# Allegro board AXKU15_V1.0.brd
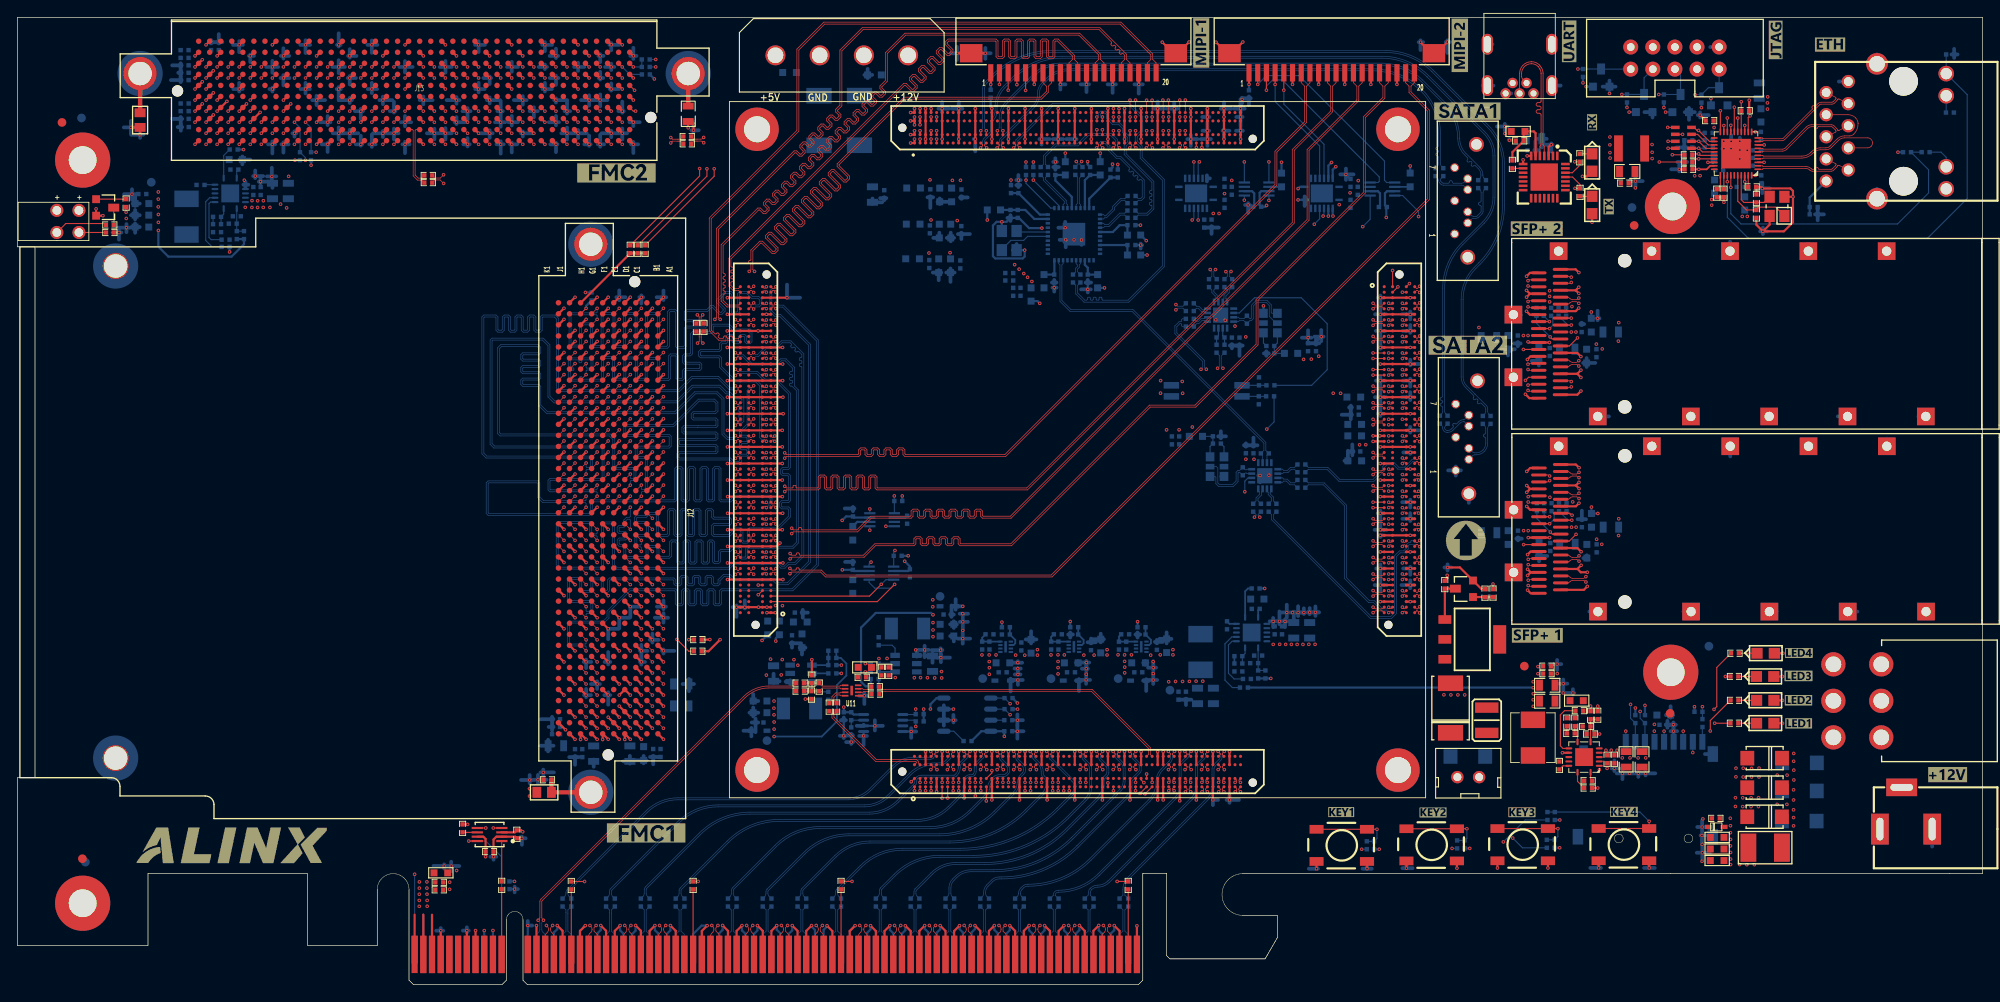
[diagram p0: board, top side]
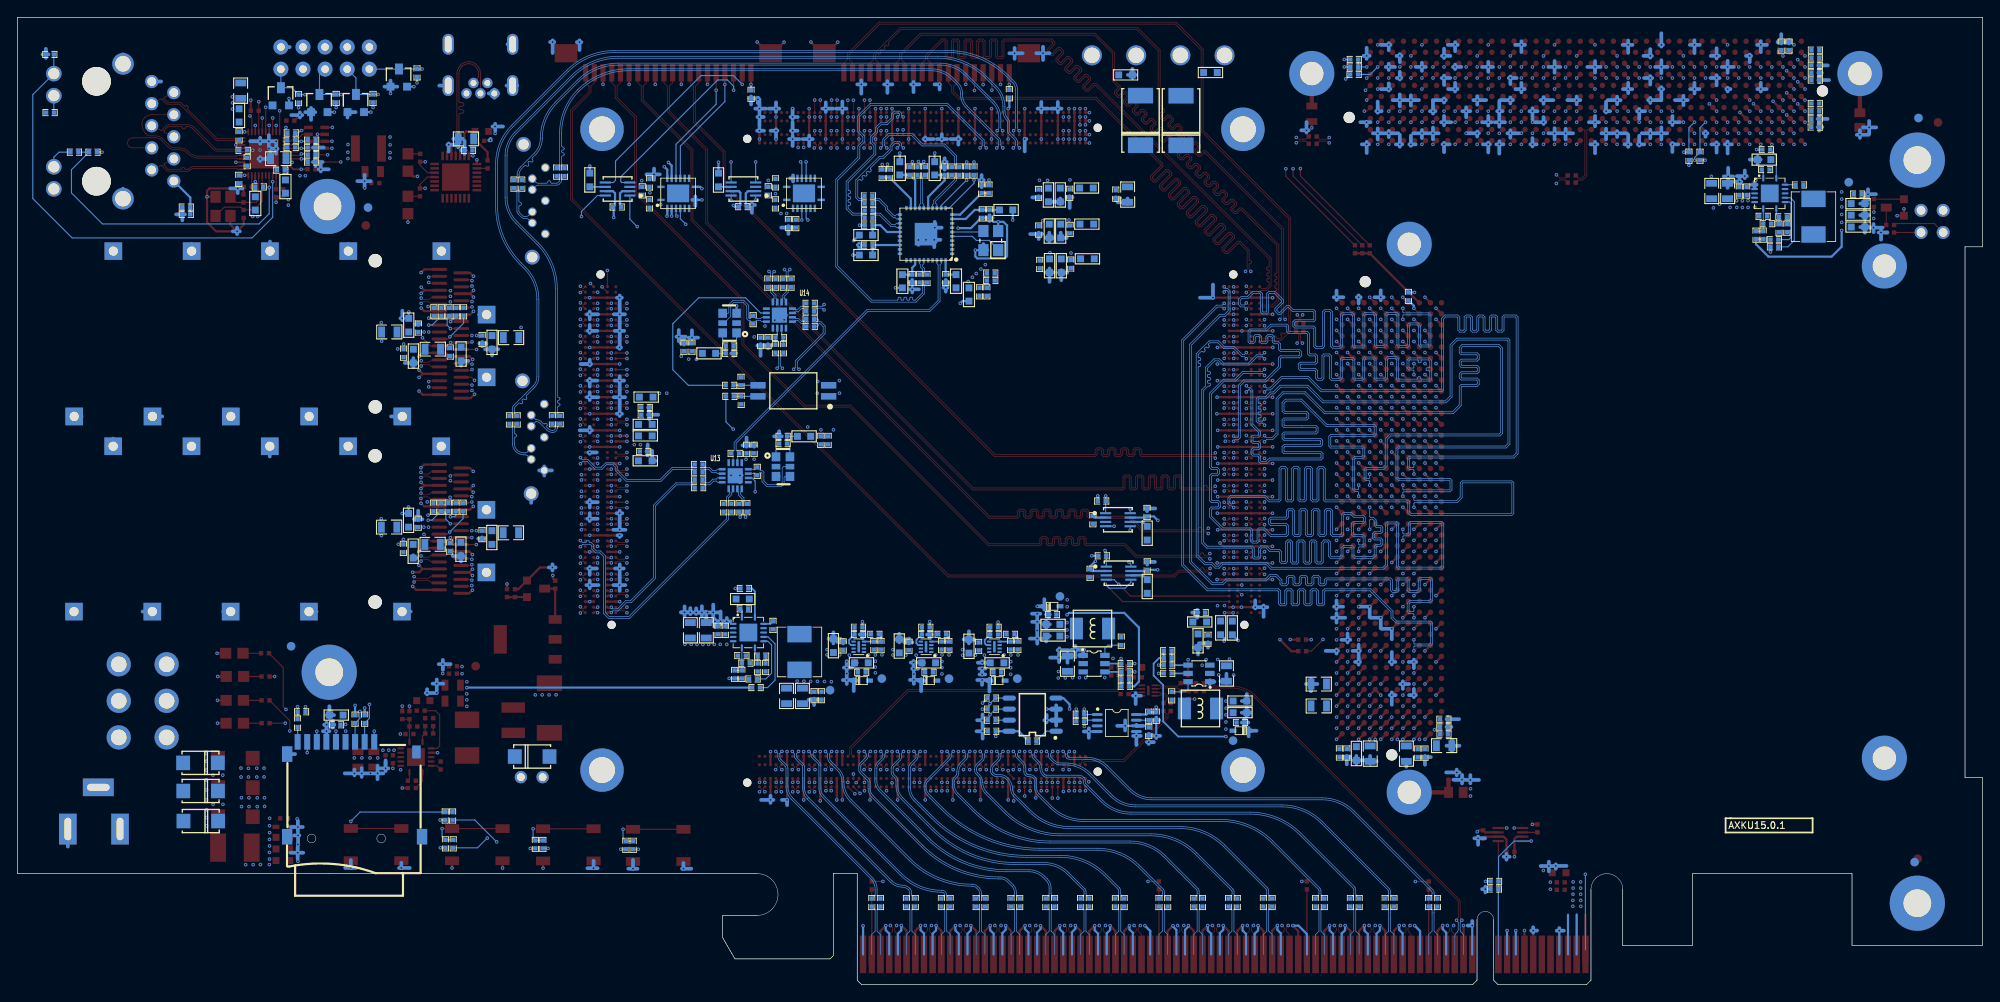
[diagram p1: board, bottom side, seen from below]

Outline 225.81 x 111.15 mm; copper layers: TOP, L2_GND, L3, L4_GND, L5, L6_VCC, L7_GND, L8, L9_GND, L10, L11_GND, L12, L13_GND, BOTTOM. Coordinates in mm from the lower left corner of the outline.
Outline path: 0,111.15 0,84.78 ; 0,111.15 189.99,111.15 ; 0,111.15 0,84.78 ; 0,111.15 189.99,111.15 ; 0,84.78 2.02,84.78 ; 0,84.78 2.02,84.78 ; 189.99,111.15 222,111.15 ; 189.99,111.15 222,111.15 ; 2.02,84.78 2.02,23.78 ; 2.02,84.78 2.02,23.78 ; 0,23.78 0,4.5 ; 0,23.78 2.02,23.78 ; 0,23.78 0,4.5 ; 0,23.78 2.02,23.78 ; 0,4.5 15,4.5 ; 0,4.5 15,4.5 ; 15,4.5 15,12.75 ; 15,4.5 15,12.75 ; 15,12.75 33.34,12.75 ; 15,12.75 33.34,12.75 ; 33.34,12.75 33.34,4.5 ; 33.34,12.75 33.34,4.5 ; 33.34,4.5 41.34,4.5 ; 33.34,4.5 41.34,4.5 ; 41.34,4.5 41.34,10.92 ; 41.34,4.5 41.34,10.92 ; 41.34,10.92 arc(43.17,12.75) 45,10.92 ; 45,10.92 45,0.51 ; 45,10.92 45,0.51 ; 45,0.51 45.51,0 ; 45,0.51 45.51,0 ; 45.51,0 55.68,0 ; 45.51,0 55.68,0 ; 55.68,0 56.19,0.51 ; 55.68,0 56.19,0.51 ; 56.19,0.51 56.19,7.45 ; 56.19,0.51 56.19,7.45 ; 56.19,7.45 arc(57.14,8.41) 58.09,7.45 ; 58.09,7.45 58.09,0.51 ; 58.09,7.45 58.09,0.51 ; 58.09,0.51 58.6,0 ; 58.09,0.51 58.6,0 ; 58.6,0 128.81,0 ; 58.6,0 128.81,0 ; 128.81,0 129.32,0.51 ; 128.81,0 129.32,0.51 ; 129.32,0.51 129.32,12.8 ; 129.32,0.51 129.32,12.8 ; 129.32,12.8 132.06,12.8 ; 129.32,12.8 132.06,12.8 ; 132.06,12.8 132.06,3.32 ; 132.06,12.8 132.06,3.32 ; 132.06,3.32 132.43,2.95 ; 132.06,3.32 132.43,2.95 ; 132.43,2.95 143.37,2.95 ; 132.43,2.95 143.37,2.95 ; 143.37,2.95 144.76,5.37 ; 143.37,2.95 144.76,5.37 ; 140.8,12.75 189.99,12.75 ; 140.8,12.75 arc(138.4,10.35) 140.8,7.96 ; 140.8,12.75 189.99,12.75 ; 189.99,12.75 222,12.75 ; 189.99,12.75 222,12.75 ; 140.8,7.96 144.76,7.96 ; 140.8,7.96 144.76,7.96 ; 144.76,7.96 144.76,5.37 ; 144.76,7.96 144.76,5.37 ; 222,111.15 225.81,111.15 ; 222,111.15 225.81,111.15 ; 222,12.75 225.81,12.75 ; 222,12.75 225.81,12.75 ; 225.81,111.15 225.81,12.75 ; 225.81,111.15 225.81,12.75

## Design rules (mm)
net group B91_L11: nets B91_L11_N B91_L11_P
net group B91_L12: nets B91_L12_N B91_L12_P
net group CLK0: nets CLK0_N CLK0_P
net group CLK1: nets CLK1_N CLK1_P
net group CLK2: nets CLK2_N CLK2_P
net group CLK3: nets CLK3_N CLK3_P
net group CLK4: nets CLK4_N CLK4_P
net group CLK5: nets CLK5_N CLK5_P
net group CLK7: nets CLK7_N CLK7_P
net group DP1: nets PCIE_TX4_N PCIE_TX4_P
net group DP2: nets PCIE_TX5_N PCIE_TX5_P
net group DP3: nets PCIE_TX6_N PCIE_TX6_P
net group DP4: nets PCIE_TX7_N PCIE_TX7_P
net group DP5: nets PCIE_TX8_N PCIE_TX8_P
net group DP6: nets PCIE_TX9_N PCIE_TX9_P
net group DP7: nets PCIE_TX10_N PCIE_TX10_P
net group DP8: nets PCIE_TX11_N PCIE_TX11_P
net group DP9: nets PCIE_TX12_N PCIE_TX12_P
net group DP10: nets PCIE_TX13_N PCIE_TX13_P
net group DP11: nets PCIE_TX14_N PCIE_TX14_P
net group DP12: nets PCIE_TX15_N PCIE_TX15_P
net group DP17: nets N23137851 N23137853
net group DP18: nets N23137905 N23137907
net group DP19: nets N23140613 N23140616
net group DP20: nets N23140649 N23140652
net group DP21: nets N23201610 N23201623
net group DP22: nets N18035589 N18035591
net group DP23: nets N18037072 N18037075
net group DP24: nets N18037090 N18037093
net group DP25: nets N18056326 N18056364
net group DP26: nets N18056302 N18056312
net group DP27: nets N18056270 N18056272
net group DP28: nets N18056216 N18056226
net group DP29: nets N18062568 N18062578
net group DP30: nets N18062486 N18062504
net group DP31: nets N18062600 N18062620
net group DP32: nets N18062640 N18062662
net group FMC1_GBTCLK0_M2C: nets FMC1_GBTCLK0_M2C_N FMC1_GBTCLK0_M2C_P
net group FMC1_GBTCLK1_M2C: nets FMC1_GBTCLK1_M2C_N FMC1_GBTCLK1_M2C_P
net group FMC1_HPC_GBTCLK0_M2C_C: nets FMC1_HPC_GBTCLK0_M2C_C_N FMC1_HPC_GBTCLK0_M2C_C_P
net group FMC1_HPC_SI_VCXO_M2C_C0: nets FMC1_HPC_SI_VCXO_M2C_C0_N FMC1_HPC_SI_VCXO_M2C_C0_P
net group FMC1_HPC_SI_VCXO_M2C_C1: nets FMC1_HPC_SI_VCXO_M2C_C1_N FMC1_HPC_SI_VCXO_M2C_C1_P
net group FMC1_HPC_SI_VCXO_M2C_C2: nets FMC1_HPC_SI_VCXO_M2C_C2_N FMC1_HPC_SI_VCXO_M2C_C2_P
net group FMC1_HPC_SI_VCXO_M2C_C3: nets FMC1_HPC_SI_VCXO_M2C_C3_N FMC1_HPC_SI_VCXO_M2C_C3_P
net group FMC2_CLK0_M2C: nets FMC2_CLK0_M2C_N FMC2_CLK0_M2C_P
net group FMC2_CLK1_M2C: nets FMC2_CLK1_M2C_N FMC2_CLK1_M2C_P
net group FMC2_GBTCLK0_M2C: nets FMC2_GBTCLK0_M2C_N FMC2_GBTCLK0_M2C_P
net group FMC2_GBTCLK1_M2C: nets FMC2_GBTCLK1_M2C_N FMC2_GBTCLK1_M2C_P
net group FMC2_HPC_GBTCLK0_M2C_C: nets FMC2_HPC_GBTCLK0_M2C_C_N FMC2_HPC_GBTCLK0_M2C_C_P
net group FMC2_HPC_GBTCLK1_M2C_C: nets FMC2_HPC_GBTCLK1_M2C_C_N FMC2_HPC_GBTCLK1_M2C_C_P
net group MGT130_CLK1: nets MGT130_CLK1_N MGT130_CLK1_P
net group MGT131_CLK1: nets MGT131_CLK1_N MGT131_CLK1_P
net group MGT132_CLK0: nets MGT132_CLK0_N MGT132_CLK0_P
net group MGT132_CLK1: nets MGT132_CLK1_N MGT132_CLK1_P
net group MGT132_RX0: nets MGT132_RX0_N MGT132_RX0_P
net group MGT132_RX1: nets MGT132_RX1_N MGT132_RX1_P
net group MGT132_RX2: nets MGT132_RX2_N MGT132_RX2_P
net group MGT132_RX3: nets MGT132_RX3_N MGT132_RX3_P
net group MGT132_TX0: nets MGT132_TX0_N MGT132_TX0_P
net group MGT132_TX1: nets MGT132_TX1_N MGT132_TX1_P
net group MGT132_TX2: nets MGT132_TX2_N MGT132_TX2_P
net group MGT132_TX3: nets MGT132_TX3_N MGT132_TX3_P
net group MGT228_CLK0: nets MGT228_CLK0_N MGT228_CLK0_P
net group MGT228_CLK1: nets MGT228_CLK1_N MGT228_CLK1_P
net group MGT229_CLK1: nets MGT229_CLK1_N MGT229_CLK1_P
net group MGT230_CLK0: nets MGT230_CLK0_N MGT230_CLK0_P
net group MGT230_CLK1: nets MGT230_CLK1_N MGT230_CLK1_P
net group MGT231_CLK1: nets MGT231_CLK1_N MGT231_CLK1_P
net group MGT_A_CLOCK: nets MGT_A_CLOCK_N MGT_A_CLOCK_P
net group MGT_B_CLOCK: nets MGT_B_CLOCK_N MGT_B_CLOCK_P
net group PCIE_CLK: nets PCIE_CLK_N PCIE_CLK_P
net group PCIE_CLKX8: nets PCIE_CLKX8_N PCIE_CLKX8_P
net group PCIE_CLKX16: nets PCIE_CLKX16_N PCIE_CLKX16_P
net group PCIE_RX0: nets PCIE_RX0_N PCIE_RX0_P
net group PCIE_RX1: nets PCIE_RX1_N PCIE_RX1_P
net group PCIE_RX2: nets PCIE_RX2_N PCIE_RX2_P
net group PCIE_RX3: nets PCIE_RX3_N PCIE_RX3_P
net group PCIE_RX4: nets PCIE_RX4_N PCIE_RX4_P
net group PCIE_RX5: nets PCIE_RX5_N PCIE_RX5_P
net group PCIE_RX6: nets PCIE_RX6_N PCIE_RX6_P
net group PCIE_RX7: nets PCIE_RX7_N PCIE_RX7_P
net group PCIE_RX8: nets PCIE_RX8_N PCIE_RX8_P
net group PCIE_RX9: nets PCIE_RX9_N PCIE_RX9_P
net group PCIE_RX10: nets PCIE_RX10_N PCIE_RX10_P
net group PCIE_RX11: nets PCIE_RX11_N PCIE_RX11_P
net group PCIE_RX12: nets PCIE_RX12_N PCIE_RX12_P
net group PCIE_RX13: nets PCIE_RX13_N PCIE_RX13_P
net group PCIE_RX14: nets PCIE_RX14_N PCIE_RX14_P
net group PCIE_RX15: nets PCIE_RX15_N PCIE_RX15_P
net group PCIE_TX0: nets PCIE_TX0_N PCIE_TX0_P
net group PCIE_TX1: nets PCIE_TX1_N PCIE_TX1_P
net group PCIE_TX2: nets PCIE_TX2_N PCIE_TX2_P
net group PCIE_TX3: nets PCIE_TX3_N PCIE_TX3_P
net group PCIE_TX8: nets N18018009 N18018011
net group PCIE_TX9: nets N18018030 N18018045
net group PCIE_TX10: nets N18018051 N18018058
net group PCIE_TX11: nets N18018080 N18018092
net group PCIE_TX12: nets N18018137 N18018139
net group PCIE_TX13: nets N18018158 N18018173
net group PCIE_TX14: nets N18018187 N18018189
net group PCIE_TX15: nets N18018221 N18018223
net group PHY_MDI0: nets PHY_MDI0_N PHY_MDI0_P
net group PHY_MDI1: nets PHY_MDI1_N PHY_MDI1_P
net group PHY_MDI2: nets PHY_MDI2_N PHY_MDI2_P
net group PHY_MDI3: nets PHY_MDI3_N PHY_MDI3_P
net group QSPF_GBT1_156M_M2C_C0: nets QSPF_GBT1_156M_M2C_C0_N QSPF_GBT1_156M_M2C_C0_P
net group QSPF_GBT1_156M_M2C_C1: nets QSPF_GBT1_156M_M2C_C1_N QSPF_GBT1_156M_M2C_C1_P
net group QSPF_GBT1_156M_M2C_C2: nets QSPF_GBT1_156M_M2C_C2_N QSPF_GBT1_156M_M2C_C2_P
net group QSPF_GBT1_156M_M2C_C3: nets QSPF_GBT1_156M_M2C_C3_N QSPF_GBT1_156M_M2C_C3_P
net group SATA1_RX: nets SATA1_RX_N SATA1_RX_P
net group SATA1_RX_C: nets SATA1_RX_C_N SATA1_RX_C_P
net group SATA1_TX: nets SATA1_TX_N SATA1_TX_P
net group SATA1_TX_C: nets SATA1_TX_C_N SATA1_TX_C_P
net group SATA2_RX: nets SATA2_RX_N SATA2_RX_P
net group SATA2_RX_C: nets SATA2_RX_C_N SATA2_RX_C_P
net group SATA2_TX: nets SATA2_TX_N SATA2_TX_P
net group SATA2_TX_C: nets SATA2_TX_C_N SATA2_TX_C_P
net group SATACLK: nets SATACLK_N SATACLK_P
net group USB: nets N16786264 N16786323
net group DP13: nets N18017158
net group DP14: nets N18017162
net group DP15: nets N18017166
net group DP16: nets N18017170
net group ETH_RX: nets ETH_RXCK ETH_RXCTL ETH_RXD0 ETH_RXD1 ETH_RXD2 ETH_RXD3
net group ETH_TX: nets ETH_TXCK ETH_TXCTL ETH_TXD0 ETH_TXD1 ETH_TXD2 ETH_TXD3
net group FMC1: nets FMC1_CLK0_N FMC1_CLK0_P FMC1_CLK1_N FMC1_CLK1_P FMC1_HA00_CC_N FMC1_HA00_CC_P FMC1_HA01_CC_N FMC1_HA01_CC_P FMC1_HA02_N FMC1_HA02_P FMC1_HA03_N FMC1_HA03_P FMC1_HA04_N FMC1_HA04_P FMC1_HA05_N FMC1_HA05_P FMC1_HA06_N FMC1_HA06_P FMC1_HA07_N FMC1_HA07_P FMC1_HA08_N FMC1_HA08_P FMC1_HA09_N FMC1_HA09_P FMC1_HA10_N FMC1_HA10_P FMC1_HA11_N FMC1_HA11_P FMC1_HA12_N FMC1_HA12_P FMC1_HA13_N FMC1_HA13_P FMC1_HA14_N FMC1_HA14_P FMC1_HA15_N FMC1_HA15_P FMC1_HA16_N FMC1_HA16_P FMC1_HA17_CC_N FMC1_HA17_CC_P FMC1_HA18_N FMC1_HA18_P FMC1_HA19_N FMC1_HA19_P FMC1_HA20_N FMC1_HA20_P FMC1_HA21_N FMC1_HA21_P FMC1_HA22_N FMC1_HA22_P FMC1_HA23_N FMC1_HA23_P FMC1_LA00_CC_N FMC1_LA00_CC_P FMC1_LA01_CC_N FMC1_LA01_CC_P FMC1_LA02_N FMC1_LA02_P FMC1_LA03_N FMC1_LA03_P FMC1_LA04_N FMC1_LA04_P FMC1_LA05_N FMC1_LA05_P FMC1_LA06_N FMC1_LA06_P FMC1_LA07_N FMC1_LA07_P FMC1_LA08_N FMC1_LA08_P FMC1_LA09_N FMC1_LA09_P FMC1_LA10_N FMC1_LA10_P FMC1_LA11_N FMC1_LA11_P FMC1_LA12_N FMC1_LA12_P FMC1_LA13_N FMC1_LA13_P FMC1_LA14_N FMC1_LA14_P FMC1_LA15_N FMC1_LA15_P FMC1_LA16_N FMC1_LA16_P FMC1_LA17_CC_N FMC1_LA17_CC_P FMC1_LA18_CC_N FMC1_LA18_CC_P FMC1_LA19_N FMC1_LA19_P FMC1_LA20_N FMC1_LA20_P FMC1_LA21_N FMC1_LA21_P FMC1_LA22_N FMC1_LA22_P FMC1_LA23_N FMC1_LA23_P FMC1_LA24_N FMC1_LA24_P FMC1_LA25_N FMC1_LA25_P FMC1_LA26_N FMC1_LA26_P FMC1_LA27_N FMC1_LA27_P FMC1_LA28_N FMC1_LA28_P FMC1_LA29_N FMC1_LA29_P FMC1_LA30_N FMC1_LA30_P FMC1_LA31_N FMC1_LA31_P FMC1_LA32_N FMC1_LA32_P FMC1_LA33_N FMC1_LA33_P
net group FMC1_DP0_M2C: nets FMC1_DP0_M2C_N FMC1_DP0_M2C_P FMC1_DP1_M2C_N FMC1_DP1_M2C_P FMC1_DP2_M2C_N FMC1_DP2_M2C_P FMC1_DP3_M2C_N FMC1_DP3_M2C_P
net group FMC1_DP4_C2M: nets FMC1_DP4_C2M_N FMC1_DP4_C2M_P FMC1_DP5_C2M_N FMC1_DP5_C2M_P FMC1_DP6_C2M_N FMC1_DP6_C2M_P FMC1_DP7_C2M_N FMC1_DP7_C2M_P
net group FMC1_DP4_M2C: nets FMC1_DP4_M2C_N FMC1_DP4_M2C_P FMC1_DP5_M2C_N FMC1_DP5_M2C_P FMC1_DP6_M2C_N FMC1_DP6_M2C_P FMC1_DP7_M2C_N FMC1_DP7_M2C_P
net group FMC1_DP_C2M: nets FMC1_DP0_C2M_N FMC1_DP0_C2M_P FMC1_DP1_C2M_N FMC1_DP1_C2M_P FMC1_DP2_C2M_N FMC1_DP2_C2M_P FMC1_DP3_C2M_N FMC1_DP3_C2M_P
net group FMC2: nets FMC2_LA00_CC_N FMC2_LA00_CC_P FMC2_LA01_CC_N FMC2_LA01_CC_P FMC2_LA02_N FMC2_LA02_P FMC2_LA03_N FMC2_LA03_P FMC2_LA04_N FMC2_LA04_P FMC2_LA05_N FMC2_LA05_P FMC2_LA06_N FMC2_LA06_P FMC2_LA07_N FMC2_LA07_P FMC2_LA08_N FMC2_LA08_P FMC2_LA09_N FMC2_LA09_P FMC2_LA10_N FMC2_LA10_P FMC2_LA11_N FMC2_LA11_P FMC2_LA12_N FMC2_LA12_P FMC2_LA13_N FMC2_LA13_P FMC2_LA14_N FMC2_LA14_P FMC2_LA15_N FMC2_LA15_P FMC2_LA16_N FMC2_LA16_P FMC2_LA17_CC_N FMC2_LA17_CC_P FMC2_LA18_CC_N FMC2_LA18_CC_P FMC2_LA19_N FMC2_LA19_P FMC2_LA20_N FMC2_LA20_P FMC2_LA21_N FMC2_LA21_P FMC2_LA22_N FMC2_LA22_P FMC2_LA23_N FMC2_LA23_P FMC2_LA24_N FMC2_LA24_P FMC2_LA25_N FMC2_LA25_P FMC2_LA26_N FMC2_LA26_P FMC2_LA27_N FMC2_LA27_P FMC2_LA28_N FMC2_LA28_P FMC2_LA29_N FMC2_LA29_P FMC2_LA30_N FMC2_LA30_P FMC2_LA31_N FMC2_LA31_P FMC2_LA32_N FMC2_LA32_P FMC2_LA33_N FMC2_LA33_P
net group FMC2_DP0_C2M: nets FMC2_DP0_C2M_N FMC2_DP0_C2M_P FMC2_DP1_C2M_N FMC2_DP1_C2M_P FMC2_DP2_C2M_N FMC2_DP2_C2M_P FMC2_DP3_C2M_N FMC2_DP3_C2M_P
net group FMC2_DP0_M2C: nets FMC2_DP0_M2C_N FMC2_DP0_M2C_P FMC2_DP1_M2C_N FMC2_DP1_M2C_P FMC2_DP2_M2C_N FMC2_DP2_M2C_P FMC2_DP3_M2C_N FMC2_DP3_M2C_P
net group FMC2_DP4_C2M: nets FMC2_DP4_C2M_N FMC2_DP4_C2M_P FMC2_DP5_C2M_N FMC2_DP5_C2M_P FMC2_DP6_C2M_N FMC2_DP6_C2M_P FMC2_DP7_C2M_N FMC2_DP7_C2M_P
net group FMC2_DP4_M2C: nets FMC2_DP4_M2C_N FMC2_DP4_M2C_P FMC2_DP5_M2C_N FMC2_DP5_M2C_P FMC2_DP6_M2C_N FMC2_DP6_M2C_P FMC2_DP7_M2C_N FMC2_DP7_M2C_P
net group MIPI1_CLK_LAN3: nets MIPI1_CLK_N MIPI1_CLK_P MIPI1_LAN0_N MIPI1_LAN0_P MIPI1_LAN1_N MIPI1_LAN1_P MIPI1_LAN2_N MIPI1_LAN2_P MIPI1_LAN3_N MIPI1_LAN3_P
net group MIPI2_CLK_LAN3: nets MIPI2_CLK_N MIPI2_CLK_P MIPI2_LAN0_N MIPI2_LAN0_P MIPI2_LAN1_N MIPI2_LAN1_P MIPI2_LAN2_N MIPI2_LAN2_P MIPI2_LAN3_N MIPI2_LAN3_P
net group PCIE: nets N18017156 N18017160 N18017164 N18017168 N18017229 N18017260 N18017281 N18017328
net group PCIE_TX4: nets N18017231
net group PCIE_TX5: nets N18017245
net group PCIE_TX6: nets N18017279
net group PCIE_TX7: nets N18017295
net group QSFP1_RX: nets QSFP1_RX1_N QSFP1_RX1_P QSFP1_RX2_N QSFP1_RX2_P QSFP1_RX3_N QSFP1_RX3_P QSFP1_RX4_N QSFP1_RX4_P
net group QSFP1_TX: nets QSFP1_TX1_N QSFP1_TX1_P QSFP1_TX2_N QSFP1_TX2_P QSFP1_TX3_N QSFP1_TX3_P QSFP1_TX4_N QSFP1_TX4_P
net group QSFP2_RX: nets QSFP2_RX1_N QSFP2_RX1_P QSFP2_RX2_N QSFP2_RX2_P QSFP2_RX3_N QSFP2_RX3_P QSFP2_RX4_N QSFP2_RX4_P
net group QSFP2_TX: nets QSFP2_TX1_N QSFP2_TX1_P QSFP2_TX2_N QSFP2_TX2_P QSFP2_TX3_N QSFP2_TX3_P QSFP2_TX4_N QSFP2_TX4_P
net group SD: nets SD_CD SD_CLK SD_CMD SD_D0 SD_D1 SD_D2 SD_D3

## Placement (name value [footprint] x y rotation side)
C1  10uF  [C0603]  153.66 63.06 180 bottom
C2  0.1uF/25V  [C0402]  153.67 65.49 180 bottom
C3  10uF  [C0603]  153.67 60.19 180 bottom
C4  0.1uF/25V  [C0402]  153.85 61.27 180 bottom
C5  100uF/25V  [D7343]  96.76 99.31 90 bottom
C6  100uF/25V  [D7343]  92.11 99.3 90 bottom
C7  22uF/25V_NC  [C0805]  98.25 90.79 270 bottom
C8  1uF/25V  [C0402]  99.61 90.84 270 bottom
C9  10uF  [C0603]  107.22 82.62 270 bottom
C10  0.1uF/25V  [C0402]  108.34 82.76 270 bottom
C11  10uF  [C0603]  107.25 86.6 270 bottom
C12  0.1uF/25V  [C0402]  108.46 86.71 270 bottom
C13  10uF  [C0603]  107.35 90.75 270 bottom
C14  0.1uF/25V  [C0402]  108.48 90.92 270 bottom
C15  10uF  [C0603]  89.96 41.67 0 bottom
C16  0.1uF/25V  [C0402]  89.79 42.75 0 bottom
C17  22uF/25V  [C0805]  184.98 93.44 0 top
C18  0.1uF/25V  [C0402]  184.69 92.11 0 top
C19  0.1uF/25V  [C0402]  198.02 91.67 180 bottom
C20  0.1uF/25V  [C0402]  199.41 94.56 90 bottom
C21  0.1uF/25V  [C0402]  199.87 95.87 180 bottom
C22  22uF/25V  [C0805]  195.84 94.93 0 bottom
C23  0.1uF/25V  [C0402]  195.55 93.6 0 bottom
C24  22uF/25V  [C0805]  200.15 102.73 90 bottom
C25  0.1uF/25V  [C0402]  192.02 93.7 180 top
C26  0.1uF/25V  [C0402]  200.38 92.54 270 bottom
C27  0.1uF/25V  [C0402]  200.34 97.54 270 bottom
C28  0.1uF/25V  [C0402]  194.45 99.29 180 top
C29  18pF/10V  [C0402]  199.82 88.57 270 top
C30  18pF/10V  [C0402]  199.83 90.35 90 top
C31  0.1uF/25V  [C0402]  206.41 89.35 0 bottom
C32  1uF/25V  [C0402]  206.41 88.52 0 bottom
C33  0.22uF  [C0402]  62.64 9.43 90 bottom
C34  0.22uF  [C0402]  63.64 9.43 90 bottom
C35  0.22uF  [C0402]  67.64 9.43 90 bottom
C36  0.22uF  [C0402]  68.64 9.43 90 bottom
C37  0.22uF  [C0402]  71.64 9.43 90 bottom
C38  0.22uF  [C0402]  72.64 9.43 90 bottom
C39  0.22uF  [C0402]  75.64 9.43 90 bottom
C40  0.22uF  [C0402]  76.65 9.43 90 bottom
C41  0.22uF  [C0402]  81.64 9.43 90 bottom
C42  0.22uF  [C0402]  82.64 9.43 90 bottom
C43  0.22uF  [C0402]  85.64 9.43 90 bottom
C44  0.22uF  [C0402]  86.64 9.43 90 bottom
C45  0.22uF  [C0402]  89.64 9.43 90 bottom
C46  0.22uF  [C0402]  90.64 9.43 90 bottom
C47  0.22uF  [C0402]  93.64 9.43 90 bottom
C48  0.22uF  [C0402]  94.64 9.43 90 bottom
C49  0.22uF  [C0402]  98.64 9.43 90 bottom
C50  0.22uF  [C0402]  99.64 9.43 90 bottom
C51  0.22uF  [C0402]  102.64 9.43 90 bottom
C52  0.22uF  [C0402]  103.64 9.43 90 bottom
C53  0.22uF  [C0402]  106.64 9.43 90 bottom
C54  0.22uF  [C0402]  107.64 9.43 90 bottom
C55  0.22uF  [C0402]  110.64 9.43 90 bottom
C56  0.22uF  [C0402]  111.64 9.43 90 bottom
C57  0.22uF  [C0402]  114.64 9.43 90 bottom
C58  0.22uF  [C0402]  115.64 9.43 90 bottom
C59  0.22uF  [C0402]  118.64 9.43 90 bottom
C60  0.22uF  [C0402]  119.64 9.43 90 bottom
C61  0.22uF  [C0402]  122.64 9.43 90 bottom
C62  0.22uF  [C0402]  123.66 9.43 90 bottom
C63  0.22uF  [C0402]  126.64 9.43 90 bottom
C64  0.22uF  [C0402]  127.64 9.43 90 bottom
C65  10uF/25V  [C0603]  48.66 12.84 0 top
C66  0.1uF/25V  [C0402]  48.47 10.89 180 top
C67  0.1uF/25V  [C0402]  48.47 11.75 180 top
C68  0.1uF  [C0402]  57.39 17.27 270 top
C69  0.1uF  [C0402]  54.25 15.28 0 top
C70  0.1uF/25V  [C0402]  94.95 30.84 270 bottom
C72  10uF  [C0603]  189.18 30.97 0 bottom
C73  0.1uF  [C0402]  189.14 29.86 0 bottom
C74  0.1uF/25V  [C0402]  113.86 29.12 0 bottom
C75  1uF/25V  [C0402]  172.62 96.96 180 top
C76  10uF/10V  [C0603]  172.44 98.05 180 top
C77  22uF/25V  [C0805]  174.27 97.2 0 bottom
C78  0.1uF/25V  [C0402]  173.98 95.87 0 bottom
C79  0.1uF  [C0402]  136.38 87.45 270 bottom
C80  0.1uF  [C0402]  137.22 87.45 270 bottom
C81  0.1uF  [C0402]  138.7 92.14 90 bottom
C82  1uF  [C0402]  138.71 89.72 270 bottom
C83  0.1uF  [C0402]  139.54 91.23 270 bottom
C84  0.1uF  [C0402]  142.46 89.4 180 bottom
C85  0.1uF  [C0402]  153.18 92.13 90 bottom
C86  0.1uF  [C0402]  153.18 89.72 270 bottom
C87  0.1uF  [C0402]  111.83 102.37 270 bottom
C88  1uF  [C0402]  141.51 102.32 270 bottom
C89  0.1uF  [C0402]  154.02 91.22 270 bottom
C90  0.1uF  [C0402]  156.9 89.36 180 bottom
C93  0.1uF/25V  [C0402]  78.02 75.51 270 top
C94  0.1uF/25V  [C0402]  78.88 75.52 270 top
C95  22uF/25V  [C0805]  76.28 32.02 0 bottom
C96  22uF/25V  [C0805]  76.28 34.54 0 bottom
C97  100pF/50V  [C0402]  60.91 23.53 180 top
C98  22uF/25V  [C0805]  70.38 26.54 270 bottom
C99  10uF/10V  [C0603]  71.96 26.56 270 bottom
C100  0.1uF/25V  [C0402]  73.06 26.62 270 bottom
C101  0.1uF/25V  [C0402]  73.9 26.62 270 bottom
C102  22uF/25V  [C0805]  66.22 26.54 270 bottom
C103  0.1uF/25V  [C0402]  64.91 26.6 270 bottom
C104  0.1uF/25V  [C0402]  64.07 26.6 270 bottom
C105  22uF/25V  [C0805]  61.87 27.45 180 bottom
C106  0.1uF/25V  [C0402]  61.89 28.79 180 bottom
C107  0.1uF/25V  [C0402]  61.89 29.61 180 bottom
C108  0.1uF/25V  [C0402]  61.89 30.5 180 bottom
C109  1uF  [C0402]  19.22 99.49 180 bottom
C110  0.1uF  [C0402]  19.22 101.26 180 bottom
C111  0.1uF  [C0402]  19.22 100.38 180 bottom
C112  0.1uF  [C0402]  19.23 98.55 180 bottom
C113  100pF 500V  [C0805]  77.08 100.07 270 top
C114  1uF  [C0402]  19.22 105.64 180 bottom
C115  0.1uF  [C0402]  19.22 104.79 180 bottom
C116  0.1uF  [C0402]  19.22 103.95 180 bottom
C117  1uF  [C0402]  22.25 107.85 90 bottom
C118  0.1uF  [C0402]  23.14 107.85 90 bottom
C119  0.1uF  [C0402]  19.21 107.39 180 bottom
C120  0.1uF  [C0402]  19.21 106.5 180 bottom
C129  0.1uF  [C0402]  100.12 35.99 270 top
C130  4.7uF  [C0402]  99.28 35.99 270 top
C131  0.1uF  [C0402]  113.97 81.77 180 bottom
C132  1uF  [C0402]  113.97 80.91 180 bottom
C133  0.1uF  [C0402]  137.83 63 0 bottom
C134  0.1uF  [C0402]  132.66 62.54 270 bottom
C135  4.7uF  [C0402]  133.5 62.54 270 bottom
C136  0.1uF  [C0402]  119.27 93.5 270 bottom
C137  0.1uF  [C0402]  115.27 79.61 270 bottom
C138  1uF  [C0402]  114.42 79.61 270 bottom
C139  0.1uF/25V  [C0402]  118.42 93.5 90 bottom
C140  0.1uF/25V  [C0402]  117.58 93.5 90 bottom
C141  0.1uF  [C0402]  123.26 93.5 270 bottom
C142  0.1uF/25V  [C0402]  122.39 93.5 90 bottom
C143  0.1uF/25V  [C0402]  121.56 93.5 90 bottom
C144  0.1uF  [C0402]  128.01 87.27 180 bottom
C145  0.1uF/25V  [C0402]  128.02 89.8 0 bottom
C146  0.1uF/25V  [C0402]  128.03 90.63 0 bottom
C147  0.1uF/25V  [C0402]  128.01 88.12 0 bottom
C148  0.1uF/25V  [C0402]  128.01 88.96 0 bottom
C149  0.1uF  [C0402]  128.01 84.99 180 bottom
C150  0.1uF  [C0402]  122.99 81.14 90 bottom
C151  0.1uF  [C0402]  114.11 88.57 270 bottom
C152  1uF  [C0402]  114.95 88.57 270 bottom
C153  0.1uF/25V  [C0402]  121.3 81.14 270 bottom
C154  0.1uF  [C0402]  143.97 72.54 180 bottom
C155  0.1uF  [C0402]  149.22 73.25 90 bottom
C156  4.7uF  [C0402]  148.31 73.25 90 bottom
C157  0.1uF/25V  [C0402]  122.14 81.14 270 bottom
C158  0.1uF  [C0402]  119.14 81.14 90 bottom
C159  0.1uF  [C0402]  141.16 61.52 90 bottom
C160  4.7uF  [C0402]  142.03 61.52 90 bottom
C161  0.1uF  [C0402]  140.42 73.89 270 bottom
C162  4.7uF  [C0402]  139.56 73.9 270 bottom
C163  0.1uF/25V  [C0402]  147.54 59.77 0 bottom
C164  0.1uF/25V  [C0402]  134.72 76.51 180 bottom
C165  0.1uF/25V  [C0402]  147.54 58.88 0 bottom
C166  0.1uF/25V  [C0402]  138.71 73.08 90 bottom
C167  0.1uF/25V  [C0402]  137.79 73.07 90 bottom
C168  0.1uF/25V  [C0402]  134.72 75.62 180 bottom
C169  0.1uF/25V  [C0402]  134.72 77.4 180 bottom
C170  0.1uF/25V  [C0402]  147.54 57.99 0 bottom
C171  0.1uF/25V  [C0402]  134.72 78.29 180 bottom
C172  0.1uF/25V  [C0402]  147.54 57.1 0 bottom
C173  0.1uF/25V  [C0402]  144.67 54.8 270 bottom
C174  0.1uF/25V  [C0402]  136.92 80.61 90 bottom
C175  0.1uF/25V  [C0402]  137.81 80.61 90 bottom
C176  0.1uF/25V  [C0402]  143.78 54.8 270 bottom
C177  0.1uF/25V  [C0402]  138.7 80.61 90 bottom
C178  0.1uF/25V  [C0402]  142.89 54.8 270 bottom
C179  0.1uF/25V  [C0402]  139.59 80.61 90 bottom
C180  0.1uF/25V  [C0402]  142 54.8 270 bottom
C181  22uF  [C0603]  180.87 53.36 90 bottom
C182  0.1uF  [C0402]  179.77 53.03 90 bottom
C183  22uF  [C0603]  171.3 51.38 270 bottom
C184  0.1uF  [C0402]  172.43 51.71 270 bottom
C185  22uF  [C0603]  180.34 49.8 270 bottom
C186  0.1uF  [C0402]  181.47 50.13 270 bottom
C187  22uF  [C0603]  174.85 50.04 270 bottom
C188  0.1uF  [C0402]  176.13 50.28 270 bottom
C189  22uF  [C0603]  180.31 72.23 270 bottom
C190  0.1uF  [C0402]  181.44 72.56 270 bottom
C191  22uF  [C0603]  180.85 75.78 90 bottom
C192  22uF  [C0603]  174.83 72.47 270 bottom
C193  0.1uF  [C0402]  176.08 72.69 270 bottom
C194  0.1uF  [C0402]  179.74 75.45 90 bottom
C195  22uF  [C0603]  171.27 73.8 270 bottom
C196  0.1uF  [C0402]  172.41 74.13 270 bottom
C213  10uF/25V  [C0603]  98.48 104.54 180 bottom
C214  10uF/25V  [C0603]  88.72 104.82 0 bottom
C215  0.1uF  [C0402]  168.75 91.99 270 bottom
C216  0.1uF  [C0402]  169.28 64.89 270 bottom
C217  0.1uF  [C0402]  167.86 91.99 270 bottom
C218  0.1uF  [C0402]  168.39 64.89 270 bottom
C219  0.1uF  [C0402]  162.96 93.37 270 bottom
C220  0.1uF  [C0402]  163.45 64.92 270 bottom
C221  0.1uF  [C0402]  163.85 93.37 270 bottom
C222  0.1uF  [C0402]  164.34 64.92 270 bottom
C233  10uF/25V  [C0603]  195.31 14.26 180 top
C234  10uF/25V  [C0603]  195.31 15.59 180 top
C235  10uF/25V  [C0603]  195.31 16.92 180 top
C236  0.1uF  [C0402]  195.16 19.1 180 top
C237  22uF/25V  [C0805]  184.86 25.89 90 top
C238  22uF/25V  [C0805]  186.69 25.89 90 top
C239  4.7uF/25V  [C0402]  182.66 25.89 90 top
C240  0.1uF/50V  [C0402]  183.51 25.89 90 top
C241  0.1uF/50V  [C0402]  177.19 25.18 90 top
C242  47uF/10V  [C0805]  175.79 32.58 180 top
C243  47uF/10V  [C0805]  175.79 34.41 180 top
C244  47uF/10V  [C0402]  175.76 35.74 180 top
C245  0.1uF/50V  [C0402]  175.76 36.59 180 top
C246  22uF/25V  [C0805]  146.66 40.72 270 bottom
C247  22uF/25V  [C0805]  148.49 40.72 270 bottom
C248  4.7uF/25V  [C0402]  144.47 40.71 270 bottom
C249  0.1uF/50V  [C0402]  145.31 40.71 270 bottom
C250  0.1uF/50V  [C0402]  138.99 41.29 270 bottom
C251  47uF/10V  [C0805]  135.6 33.17 90 bottom
C252  47uF/10V  [C0805]  137.43 33.17 90 bottom
C253  47uF/10V  [C0402]  134.27 33.2 90 bottom
C254  0.1uF/50V  [C0402]  133.42 33.2 90 bottom
C255  NC  [C0402]  180.77 30.96 270 top
C256  NC  [C0402]  142.57 35.64 90 bottom
C257  4.7uF/25V  [C0402]  142.57 37.81 180 bottom
C258  22n  [C0402]  141.28 35.13 0 bottom
C259  4.7uF/25V  [C0402]  180.77 28.8 180 top
C260  22n  [C0402]  179.48 31.48 0 top
C261  22p  [C0402]  178.95 30.16 90 top
C262  15n  [C0402]  178.04 30.16 90 top
C263  22p  [C0402]  140.76 36.44 270 bottom
C264  15n  [C0402]  139.84 36.44 270 bottom
C265  100uF 25V  [D7343]  164.68 31.78 90 top
C266  10uF/10V  [C0603]  105.93 86.6 270 bottom
C267  0.1uF/10V  [C0402]  104.85 86.79 270 bottom
C268  10uF/10V  [C0603]  105.86 82.61 270 bottom
C269  0.1uF/10V  [C0402]  104.78 82.8 270 bottom
C270  0.01uF  [C0402]  119.62 38.96 90 bottom
C271  10uF/10V  [C0603]  121.09 36.98 0 bottom
C272  0.1uF/10V  [C0402]  121.06 35.89 0 bottom
C273  10uF/10V  [C0603]  105.98 90.75 270 bottom
C274  0.1uF/10V  [C0402]  104.9 90.94 270 bottom
C275  22uF/10V  [C0603]  124.48 38.91 90 bottom
C276  0.1uF/10V  [C0402]  123.37 38.89 90 bottom
C277  0.01uF/10V  [C0402]  98.97 39.46 90 bottom
C278  0.1uF/10V  [C0402]  121.43 40.23 180 bottom
C279  22uF/25V  [C0805]  105.15 36.88 90 bottom
C280  22uF/10V  [C0603]  106.81 40.06 0 bottom
C281  22uF/10V  [C0603]  106.81 41.4 0 bottom
C282  0.1uF/10V  [C0402]  106.88 42.53 0 bottom
C283  150pF/10V  [C0402]  98.51 34.28 180 bottom
C284  22uF/25V  [C0805]  29.3 91.2 270 bottom
C285  4.7uF/25V  [C0402]  27.11 91.2 270 bottom
C286  0.1uF/50V  [C0402]  21.04 91.9 180 bottom
C287  22uF/10V  [C0603]  14.31 87.06 0 bottom
C288  22uF/10V  [C0603]  14.31 88.42 0 bottom
C289  0.1uF/50V  [C0402]  14.35 90.85 0 bottom
C290  22uF/25V  [C0805]  31.13 91.2 270 bottom
C291  0.1uF/50V  [C0402]  27.96 91.2 270 bottom
C292  22uF/10V  [C0603]  14.31 89.75 0 bottom
C293  0.01uF  [C0402]  111.69 38.97 90 bottom
C294  10uF/10V  [C0603]  113.24 36.98 0 bottom
C295  0.1uF/10V  [C0402]  113.21 35.89 0 bottom
C296  22uF/10V  [C0603]  116.48 38.88 90 bottom
C297  0.1uF/10V  [C0402]  115.36 38.86 90 bottom
C298  NC  [C0402]  25.21 86.13 90 bottom
C299  0.1uF/10V  [C0402]  113.58 40.23 180 bottom
C300  4.7uF/25V  [C0402]  25.21 88.29 180 bottom
C301  22n  [C0402]  23.92 85.61 0 bottom
C302  22p  [C0402]  23.4 86.93 270 bottom
C303  15n  [C0402]  22.48 86.93 270 bottom
C304  10uF/10V  [C0603]  90.15 39.51 270 bottom
C305  0.1uF/10V  [C0402]  89.01 39.68 270 bottom
C306  10uF/10V  [C0603]  153.66 64.38 180 bottom
C307  0.1uF/10V  [C0402]  153.68 66.33 180 bottom
C308  0.01uF/10V  [C0402]  93.18 33.19 270 bottom
C309  0.01uF  [C0402]  127.41 38.96 90 bottom
C310  10uF/10V  [C0603]  128.83 36.98 0 bottom
C311  0.1uF/10V  [C0402]  128.8 35.89 0 bottom
C312  22uF/10V  [C0603]  132.05 38.95 90 bottom
C313  22uF/25V  [C0805]  86.89 35.75 270 bottom
C314  0.1uF/10V  [C0402]  130.93 38.93 90 bottom
C315  22uF/10V  [C0603]  85.34 32.59 180 bottom
C316  22uF/10V  [C0603]  85.34 31.25 180 bottom
C317  0.1uF/10V  [C0402]  85.27 30.12 180 bottom
C318  150pF/10V  [C0402]  93.64 38.37 0 bottom
C319  0.1uF/10V  [C0402]  129.17 40.23 180 bottom
C320  0.1uF/25V  [C0402]  76.97 97.46 180 top
C321  0.1uF/25V  [C0402]  76.97 96.62 180 top
C322  0.1uF/25V  [C0402]  47.21 92.99 180 top
C323  0.1uF/25V  [C0402]  47.22 92.16 180 top
C324  0.1uF  [C0402]  97.07 35.31 0 top
C325  0.1uF  [C0402]  89.94 34.64 0 top
C326  0.1uF  [C0402]  89.94 33.73 0 top
C327  0.1uF  [C0402]  93.29 31.89 270 top
C328  0.1uF  [C0402]  94.13 31.89 270 top
C329  0.1uF  [C0402]  98.59 33.38 0 top
C330  0.1uF  [C0402]  98.58 34.24 0 top
C331  0.1uF  [C0402]  102.55 47.27 90 bottom
C332  0.1uF  [C0402]  95.99 48.12 90 bottom
C333  0.1uF  [C0402]  102.23 53.42 90 bottom
C334  0.1uF  [C0402]  96.01 54.26 90 bottom
CN1  AJ243-3-3C  [DC-JACK]  220.02 17.87 90 top
D1  BAT54S  [SOT23-3]  182.94 103.19 180 bottom
D2  BAT54S  [SOT23-3]  187.88 100.27 180 bottom
D3  BAT54S  [SOT23-3]  192.07 100.26 180 bottom
D4  BAT54S  [SOT23-3]  196.5 101.04 180 bottom
D5  B340A  [SMA]  204.76 22.25 180 bottom
D6  B340A  [SMA]  204.74 18.79 180 bottom
D7  B340A  [SMA]  204.78 25.48 180 bottom
D8  B340A  [SMA]  200.76 22.64 0 top
D9  B340A  [SMA]  200.76 19.29 0 top
D10  B340A  [SMA]  200.77 26.02 0 top
D11  B340A  [SMA]  166.66 26.21 0 bottom
F1  5A  [FUSE_1812]  200.83 15.74 180 top
FB1  FB/120ohm/0.04ohm/2A/0603  [L0603]  142.47 44.31 180 bottom
FB2  FB/120ohm/0.04ohm/2A/0603  [L0603]  179.17 32.63 0 top
FB3  FB/120ohm/0.04ohm/2A/0603  [L0603]  25.09 94.81 180 bottom
G3  SiT9365AI-2B1-33E156.250000_NC  [OSC6-3225]  137.85 59.52 270 bottom
G4  SiT9365AI-2B1-33E156.250000  [OSC6-3225]  143.98 76.02 90 bottom
HOLE1  NC  [FPAD_1]  84.99 98.3 180 top
HOLE2  NC  [FPAD_1]  158.64 98.3 180 top
HOLE3  NC  [FPAD_1]  84.99 24.65 180 top
HOLE4  NC  [FPAD_1]  158.64 24.65 180 top
J1  -  [LB2715-E60P-B0R_ADM]  121.82 24.48 180 top
J2  -  [LB2715-E60P-B0R_ADM]  158.81 61.47 90 top
J3  -  [LB2715-E60P-B0R_ADM]  121.82 98.47 180 top
J4  -  [LB2715-E60P-B0R_ADM]  84.82 61.47 270 top
J5  HR911130A  [GE_RJ45]  216.73 92.32 0 top
J6  Micro SD  [MICRO_SD]  184.81 27.89 180 bottom
J7  HEADER 5X2  [BH2X5P_2_54]  190.46 106.47 0 top
J8  MINI_USB  [MINI_USB_DIP]  172.61 103.31 180 top
J9  CON20  [FPC100C047-20]  121.35 105.91 0 top
J10  CON20  [FPC100C047-20]  151.02 105.91 0 top
J12  ASP_134486_01  [ASP_134486_MAIN_FEMALE]  67.89 53.59 90 top
J13  ASP_134486_01  [ASP_134486_MAIN_FEMALE-A]  45.59 102.7 0 top
J14  QSFP & CONN  [QSFP100G]  181.53 52.37 180 top
J15  QSFP & CONN  [QSFP100G]  181.51 74.79 180 top
J18  201-F041J15P-B35  [SATA8981]  94.72 106.79 0 top
J19  CON9  [SATA-7]  165.15 90.08 270 top
J20  CON9  [SATA-7]  165.28 62.9 270 top
J21  39-30-1060  [CON_MOL_5569_6P]  214.17 36.81 0 top
J30  2P_2.54_White  [XH2-2_54_WHITE]  167.96 23.84 180 top
KEY1  KEY  [KEY_4X4X1_5]  152.18 16 0 top
KEY2  KEY  [KEY_4X4X1_5]  162.51 16.06 0 top
KEY3  KEY  [KEY_4X4X1_5]  172.97 16.08 0 top
KEY4  KEY  [KEY_4X4X1_5]  184.6 16.09 0 top
L1  2.2uH  [LVS303010]  186.47 96.09 90 top
L2  120OHM@100Mhz  [L0603]  198.48 89.77 90 bottom
L3  120OHM@100Mhz  [L0603]  200.34 99.89 270 bottom
L4  120OHM@100Mhz  [L0603]  195.02 91.71 90 bottom
L7  BLM18SG121TN1  [L0603]  116.47 79.31 90 bottom
L8  120Ohm@100MHz  [L0603]  135.42 63 180 bottom
L9  BLM18SG121TN1  [L0603]  120.41 93.8 270 bottom
L10  BLM18SG121TN1  [L0603]  124.42 93.8 270 bottom
L11  BLM18SG121TN1  [L0603]  128.31 86.14 180 bottom
L12  BLM18SG121TN1  [L0603]  128.31 83.84 180 bottom
L13  120Ohm@100MHz  [L0603]  146.35 72.54 0 bottom
L14  BLM18SG121TN1  [L0603]  112.2 89.02 0 bottom
L15  BLM18SG121TN1  [L0603]  124.12 80.83 90 bottom
L16  BLM18SG121TN1  [L0603]  117.96 80.83 90 bottom
L17  1uH  [L0805]  178.1 50.59 180 bottom
L18  1uH  [L0805]  183.1 52.57 180 bottom
L19  1uH  [L0805]  169.11 51.93 0 bottom
L20  1uH  [L0805]  178.08 73.02 180 bottom
L21  1uH  [L0805]  183.08 74.99 180 bottom
L22  1uH  [L0805]  169.09 74.36 0 bottom
L29  HPIF0502SQ-3R3M  [L5_1X5_7]  135.95 40.27 270 bottom
L30  HPIF0502SQ-3R3M  [L5_1X5_7]  174.14 26.33 90 top
L31  HPIF0402SQ-3R3M  [L4_4X4_2]  102.28 40.92 270 bottom
L32  HPIF0502SQ-3R3M  [L5_1X5_7]  19.43 90.3 270 bottom
L33  HPIF0402SQ-3R3M  [L4_4X4_2]  89.87 31.73 90 bottom
L34  120Ohm@100MHz  [L0603]  97.37 36.45 180 top
LED1  RED  [LED0805]  180.93 94.47 180 top
LED2  RED  [LED0805]  180.94 89.59 180 top
LED3  DUAL_LED  [LED_D3_WX2]  4.53 86.43 0 top
LED4  RED  [LED0805]  200.84 30.04 270 top
LED5  RED  [LED0805]  200.84 32.66 270 top
LED6  RED  [LED0805]  200.82 35.41 270 top
LED7  RED  [LED0805]  200.89 38.08 270 top
NOREF  -  [unnamed]  5.12 99.08 0 top
NOREF#2  -  [unnamed]  7.47 14.47 0 top
NOREF#3  -  [unnamed]  189.91 31.17 0 top
NOREF#4  -  [unnamed]  185.78 87.24 0 top
NOREF#5  -  [unnamed]  7.81 14.07 180 bottom
NOREF#6  -  [unnamed]  7.37 99.59 180 bottom
NOREF#7  -  [unnamed]  194.36 38.88 180 bottom
NOREF#8  -  [unnamed]  185.53 89.3 180 bottom
P1  PCIeX16  [PCIE_16LANE_EDGE]  45.64 3.52 0 top
Q1  MMBT3904LT1G  [SOT23-3]  9.04 90.26 270 top
Q2  DW24D5-E  [SOD523]  195.21 18.12 270 top
Q3  NDT3055L  [SOT-223]  167.17 39.67 270 top
Q4  MMBT3904LT1G  [SOT23-3]  167.26 44.54 90 top
Q5  DW03D5-B-E  [SOD523]  121.07 34.94 270 bottom
Q6  DW03D5-B-E  [SOD523]  106.91 43.47 270 bottom
Q7  DW03D5-B-E  [SOD523]  113.22 34.94 270 bottom
Q8  DW03D5-B-E  [SOD523]  128.81 34.94 270 bottom
Q9  DW03D5-B-E  [SOD523]  85.24 29.17 90 bottom
R1  4.7K  [R0402]  196.09 90.95 270 top
R2  4.7K  [R0402]  217.13 95.66 180 bottom
R3  4.7K  [R0402]  222.08 106.89 0 bottom
R4  510R  [R0402]  222.06 100.21 0 bottom
R5  510R  [R0402]  219.27 95.66 180 bottom
R6  33R  [R0402]  192.02 94.53 180 top
R7  33R  [R0402]  192.01 95.36 180 top
R8  4.7K  [R0402]  195.27 90.95 90 top
R9  1.5K  [R0402]  198.54 100.42 0 top
R10  2.49K/1%  [R0402]  199.34 91.67 180 top
R11  4.7K  [R0402]  194.34 97.88 0 bottom
R12  4.7K  [R0402]  194.35 97.04 0 bottom
R13  4.7K  [R0402]  194.35 96.21 0 bottom
R14  4.7K  [R0402]  192.01 94.53 0 bottom
R15  4.7K  [R0402]  192 95.36 0 bottom
R16  NC  [R0402]  192 97.04 0 bottom
R17  NC  [R0402]  192 96.2 0 bottom
R18  4.7K  [R0402]  56.08 11.86 0 bottom
R19  0R_NC  [R0402]  55.65 11.41 270 top
R20  NC  [R0402]  56.09 10.98 0 bottom
R21  0R  [R0402]  63.64 11.39 90 top
R22  0R  [R0402]  77.64 11.4 90 top
R23  0R  [R0402]  94.64 11.4 90 top
R24  0R  [R0402]  127.64 11.4 90 top
R25  1K  [R0402]  51.15 17.96 270 top
R26  4.7K  [R0402]  103.68 30.25 180 bottom
R27  4.7K  [R0402]  103.68 31.07 180 bottom
R28  NC  [R0402]  95.81 30.84 90 bottom
R29  0R  [R0402]  95.81 29.1 90 bottom
R30  4.7K  [R0402]  113.89 32.93 180 bottom
R31  4.7K  [R0402]  113.89 31.66 180 bottom
R32  10K  [R0402]  185.91 30.51 90 bottom
R33  10K  [R0402]  187.02 30.51 90 bottom
R34  4.7K  [R0402]  109.18 27.99 180 bottom
R35  0R  [R0402]  113.87 30.39 0 bottom
R36  10K  [R0402]  193.16 31.35 180 bottom
R37  330R  [R0402]  193.62 30.06 90 bottom
R38  10K/1%  [R0402]  171.79 94.26 90 top
R39  510R  [R0402]  179.53 95.02 90 top
R40  510R  [R0402]  179.56 91.05 270 top
R41  10K/1%  [R0402]  179.9 104.76 90 bottom
R42  10K/1%  [R0402]  184.95 101.84 90 bottom
R43  10K/1%  [R0402]  189.19 101.84 90 bottom
R44  10K/1%  [R0402]  193.51 101.82 90 bottom
R45  510R  [R0402]  10.62 87.29 180 top
R46  510R  [R0402]  10.63 86.43 180 top
R47  1K  [R0402]  12.49 89.81 270 top
R48  10K/1%  [R0402]  155.9 16.01 270 bottom
R49  10K/1%  [R0402]  166.3 16.11 270 bottom
R50  1K  [R0402]  155.05 16.01 270 bottom
R51  1K  [R0402]  165.44 16.11 270 bottom
R52  220R  [R0402]  197.29 30.04 0 top
R53  220R  [R0402]  197.3 32.67 0 top
R54  220R  [R0402]  197.3 35.41 0 top
R55  220R  [R0402]  197.36 38.08 0 top
R56  10K/1%  [R0402]  176.63 16.18 270 bottom
R57  10K/1%  [R0402]  176.66 19.37 270 bottom
R58  1K  [R0402]  175.73 16.18 270 bottom
R59  1K  [R0402]  175.81 19.37 270 bottom
R60  1K  [R0603]  145.25 92.47 270 bottom
R61  1K  [R0603]  160.04 92.47 270 bottom
R62  4.7K  [R0402]  65.98 79.09 270 bottom
R63  4.7K  [R0402]  78.19 39.64 0 top
R64  4.7K  [R0402]  78.18 38.31 0 top
R65  NC  [R0805]  60.4 22.09 180 top
R66  4.7K  [R0402]  72.21 104.6 180 bottom
R67  4.7K  [R0402]  33.74 95.2 270 bottom
R68  4.7K  [R0402]  32.47 95.2 270 bottom
R69  NC  [R0805]  14.1 99.23 270 top
R72  49.9R_NC 1%  [R0402]  91.24 33.27 270 top
R73  49.9R_NC 1%  [R0402]  91.29 35.1 90 top
R74  100R_NC 1%  [R0402]  92.13 34.19 90 top
R80  4.7K  [R0402]  137.83 62.17 0 bottom
R81  2.49K/1%  [R0402]  114.17 91.42 270 bottom
R82  2.49K/1%  [R0402]  126.44 93.21 270 bottom
R83  1K/1%  [R0402]  116.74 93.49 270 bottom
R84  1K/1%  [R0402]  115.89 93.49 270 bottom
R85  4.7K  [R0402]  143.97 73.39 180 bottom
R86  NC  [R0402]  115.02 91.42 90 bottom
R87  NC  [R0402]  125.6 93.21 90 bottom
R88  1K  [R0402]  143.94 67.6 0 bottom
R89  1K  [R0402]  143.98 68.87 0 bottom
R90  1K  [R0402]  142.65 67.14 270 bottom
R91  1K  [R0402]  142.67 69.33 90 bottom
R92  100R 1%  [R0402]  143.34 61.04 180 bottom
R93  100R 1%  [R0402]  138.25 74.37 0 bottom
R94  100R 1%  [R0402]  140.8 58.99 270 bottom
R95  100R 1%  [R0402]  141.27 76.41 90 bottom
R96  4.7K  [R0402]  174.6 54.86 90 bottom
R97  4.7K  [R0402]  176.29 54.86 90 bottom
R98  4.7K  [R0402]  175.44 54.86 90 bottom
R99  4.7K  [R0402]  177.14 54.86 90 bottom
R100  4.7K  [R0402]  178.01 54.86 90 bottom
R101  4.7K  [R0402]  174.55 77.32 90 bottom
R102  4.7K  [R0402]  176.24 77.32 90 bottom
R103  4.7K  [R0402]  175.38 77.32 90 bottom
R104  4.7K  [R0402]  177.09 77.32 90 bottom
R105  4.7K  [R0402]  177.96 77.32 90 bottom
R116  11K_1%  [R0402]  181.59 30.96 90 top
R117  10K_1%  [R0402]  143.4 35.64 270 bottom
R118  10K/1%  [R0402]  140.94 34.14 180 bottom
R119  100K  [R0402]  180.49 22.59 0 top
R120  100K  [R0402]  142.28 45.52 0 bottom
R121  100K  [R0402]  180.49 23.43 0 top
R122  3.83K  [R0402]  178.5 28.86 0 top
R123  100K  [R0402]  142.29 43.18 0 bottom
R124  3.83K  [R0402]  140.3 37.74 0 bottom
R125  1.5K_1%  [R0402]  180.31 29.66 180 top
R126  2.21K_1%  [R0402]  142.11 36.94 180 bottom
R127  1K  [R0402]  164.01 45.96 90 top
R128  10R  [R1210]  168.84 30.38 270 top
R129  1K  [R0402]  169.56 44.99 90 top
R130  10K/1%  [R0402]  168.64 44.98 90 top
R131  0R  [R0603]  102.93 87.39 0 bottom
R132  0R  [R0603]  102.86 83.41 0 bottom
R133  0R  [R0603]  102.98 91.54 0 bottom
R134  10K_1%  [R0402]  121.43 41.07 0 bottom
R135  18.7K/1%  [R0402]  118.79 38.96 90 bottom
R136  15K_1%  [R0402]  119.55 40.25 0 bottom
R137  18.7K/1%  [R0402]  98.51 35.11 0 bottom
R138  15K/1%  [R0402]  98.51 35.94 180 bottom
R139  10K/1%  [R0402]  98.51 36.89 0 bottom
R140  10K_1%  [R0402]  113.58 41.07 0 bottom
R141  18.7K/1%  [R0402]  110.86 38.97 90 bottom
R142  10K/1%  [R0402]  23.92 84.78 180 bottom
R143  11K_1%  [R0402]  26.04 86.13 270 bottom
R144  15K_1%  [R0402]  111.7 40.25 0 bottom
R145  100K  [R0402]  24.85 95.97 0 bottom
R146  100K  [R0402]  24.93 93.66 0 bottom
R147  3.83K  [R0402]  22.94 88.23 0 bottom
R148  5.49K_1%  [R0402]  24.74 87.45 180 bottom
R149  0R  [R0603]  86.21 40.99 90 bottom
R150  0R_NC  [R0603]  87.55 40.99 90 bottom
R151  0R  [R0603]  153.56 67.52 0 bottom
R152  10K_1%  [R0402]  129.17 41.07 0 bottom
R153  18.7K/1%  [R0402]  126.58 38.96 90 bottom
R154  18.7K/1%  [R0402]  93.64 37.54 180 bottom
R155  15K/1%  [R0402]  93.64 36.71 0 bottom
R156  15K_1%  [R0402]  127.29 40.25 0 bottom
R157  10K/1%  [R0402]  93.64 35.76 180 bottom
R158  0R  [R0402]  72.13 84.5 270 top
R159  0R  [R0402]  71.28 84.5 270 top
R160  0R  [R0402]  70.42 84.5 270 top
R161  0R  [R0402]  72.2 105.46 180 bottom
R162  0R  [R0402]  72.2 106.32 180 bottom
R163  10K  [R0402]  101.15 49.28 0 bottom
R164  10K  [R0402]  101.22 55.57 0 bottom
R165  1K  [R0603]  95.99 45.75 90 bottom
R166  1K  [R0603]  95.99 51.87 90 bottom
RN1  33R  [RN-8P]  190.51 98.51 0 top
S1  NC  [MH_250H125]  190.18 89.42 0 top
S2  NC  [MH_250H125]  7.5 94.75 0 top
S3  NC  [MH_250H125]  7.5 9.35 0 top
S4  NC  [MH_250H125]  189.98 35.9 0 top
SW2  SW DIP-2  [2P2_1_27MM]  136.65 68.23 90 bottom
TP1  NC  [MARK]  132.44 33.84 90 bottom
TP2  NC  [MARK]  173.16 36.6 180 top
TP3  NC  [MARK]  118.77 35.16 180 bottom
TP4  NC  [MARK]  106.02 44.61 270 bottom
TP5  NC  [MARK]  110.92 35.16 180 bottom
TP6  NC  [MARK]  15.38 92.21 0 bottom
TP7  NC  [MARK]  126.49 35.17 180 bottom
TP8  NC  [MARK]  86.13 28.04 90 bottom
U1  JL2121-N040I  [QFN40-5X5]  199.98 98 180 top
U2  TXS0102DCU  [TSSOP8]  54.25 17.25 90 top
U3  LM75A  [TSSOP8-3X4_9_0_65]  99.49 30.06 270 bottom
U5  24LC04  [SOIC-8]  109.15 31.02 90 bottom
U6  CP2102-GM  [QFN-28]  175.45 92.8 270 top
U7  SN74AVCH4T245RGY  [PVQFN-N16]  135.43 90.93 180 bottom
U8  TXS0102DCU  [TSSOP8]  142.39 91.43 90 bottom
U9  SN74AVCH4T245RGY  [PVQFN-N16]  149.89 90.93 180 bottom
U10  TXS0102DCU  [TSSOP8]  156.85 91.43 90 bottom
U11  Si53102-A3  [SI53102-A3]  95.86 33.79 0 top
U12  Si5332BD11025-4  [QFN-40]  121.41 86.24 0 bottom
U13  Si53340-B-GM  [SI53340]  143.33 58.48 0 bottom
U14  Si53340-B-GM  [SI53340]  138.25 76.94 180 bottom
U15  SGM61163  [TQFN-14-3_5X3_5]  181.77 27.14 180 top
U16  SGM61163  [TQFN-14-3_5X3_5]  143.57 39.46 180 bottom
U17  ETA5060V0DBI  [DFN-8_1_2X1_6]  120.8 39.62 0 bottom
U18  ETA1471FT2G  [SOT23-6]  102.1 36.89 270 bottom
U19  ETA5060V0DBI  [DFN-8_1_2X1_6]  112.95 39.62 0 bottom
U20  SGM61130  [TQFN-14-3_5X3_5]  26.2 89.93 180 bottom
U21  ETA5060V0DBI  [DFN-8_1_2X1_6]  128.54 39.62 0 bottom
U22  ETA1471FT2G  [SOT23-6]  90.05 35.76 90 bottom
U23  TXS0102DCU  [TSSOP8]  99.28 47.28 270 bottom
U24  TXS0102DCU  [TSSOP8]  99.36 53.42 270 bottom
Y1  25MHZ  [OSC3225]  202.19 89.44 90 top
Y3  26MHZ/CL=9pF  [OSC3225]  113.96 85.5 90 bottom

## Library data of the parts
C1-C7 C9-C30 C65-C70 C72 C73 C75 C76 C79 C81-C86 C88-C90 C93-C120 C129-C196 C213-C222 C233-C235 C237 C238 C242 C243 C246 C247 C251 C252 C266-C269 C271-C274 C276-C281 C283 C284 C287 C288 C290 C294 C295 C297 C299 C304-C308 C310 C311 C313-C316 C318-C334 = CAP NP
C8 C78 C80 C87 C236 C239-C241 C244 C245 C248-C250 C253-C264 C282 C285 C286 C289 C291 C292 C298 C300-C303 C317 = C_1
C31 C32 = CAP_3
C33-C48 = CAP NP: signal model: CAP_NP_C0402_0.1UF_0.1uF
C49-C64 = CAP NP: signal model: CAP_NP_C0402_0.22UF_0.22uF
C74 = 0.1uF
C77 = 47uF
C265 = C
C270 C293 C309 = 10nF
C275 C296 C312 = 22uF
CN1 = AJ243_0
D1-D4 = SBL1645CT/TO_0
D5-D11 = BZX84C33/SOT_0
F1 = FUSE
FB1-FB3 L7-L22 L34 = MPZ1608
G3 G4 = OSC_7050_NC
HOLE1-HOLE4 = TEST POINT
J1-J4 = ADF6-40-03_0.5-L-4-2-A-TR
J5 = GE_RJ45_2
J6 = Micro SD_2
J7 = HEADER 5X2
J8 = USB_B_3
J9 J10 = CON15_1
J12 J13 = ASP_134486_0
J14 J15 = QSPF_CON_2
J18 = 4 HEADER
J19 J20 = CON9_0
J21 = 39-30-1060_2
J30 = CON2-2_54P
KEY1-KEY4 = Button_0
L1-L4 L29 L30 L32 = INDUCTOR
L31 L33 = CHOKE RF-IRON_0
LED1 LED2 LED4-LED7 = LN211WP
LED3 = DUAL_LED_0
P1 = PCIex4_3
Q1 Q4 = L14P2/TO_1
Q2 Q5-Q9 = ZEN_LED
Q3 = NDT3055L_0
R1-R17 R28 R29 R32 R33 R36-R46 R48-R59 R62-R69 R72-R74 R86-R95 R127 R131-R133 R137 R138 R149-R151 R154 R155 R158-R162 = RESISTOR
R18-R24 R80 R83-R85 R96-R105 R134-R136 R140 R141 R144 R152 R153 R156 = R
R25 R60 R61 R165 R166 = RESISTOR_0
R26 R27 R30 R31 R34 = 4.7K
R35 = 0R
R47 R128-R130 = R1005_0
R81 R82 = R0402
R116 R117 R143 = 56K 1%
R118-R124 R139 R142 R145-R147 R157 R163 R164 = 100K
R125 R126 R148 = 75K 1%
RN1 = RESARR_IS_4/SM
S1-S4 = screw_0
SW2 = SW DIP-2
TP1-TP8 = TP
U1 = JL2121D-N040I
U2 U8 U10 U23 U24 = TXS0102DCU_1
U3 = LM75
U5 = ATSHA204_2
U6 = CP2102_0
U7 U9 = 74AVCH4T245_1
U11 = Si53102-A3_0
U12 = SI5332BD10698-GM2
U13 U14 = Si53340-B-GM
U15 U16 U20 = SGM61163
U17 U19 U21 = ETA5060
U18 U22 = ETA1471FT2G
Y1 Y3 = X3_0

## Footprints (pads in the part's own frame, mm; a bottom-side part is the same pattern mirrored in y, then rotated)
2P2_1_27MM
  rect 0.759x1.77 smd: 1(-0.635,-4.059) 2(0.635,-4.059) 3(0.635,4.059) 4(-0.635,4.059)
ASP_134486_MAIN_FEMALE
  round 2.997 hole 2.692: (-27.562,56.601) (28.989,56.601)
  round 1.295 hole 1.295 unplated: (-27.191,0.003) (27.191,-3.045)
  round 0.635 smd: A1(24.765,-5.712) A2(23.495,-5.712) A3(22.225,-5.712) A4(20.955,-5.712) A5(19.685,-5.712) A6(18.415,-5.712) A7(17.145,-5.712) A8(15.875,-5.712) A9(14.605,-5.712) A10(13.335,-5.712) A11(12.065,-5.712) A12(10.795,-5.712) A13(9.525,-5.712) A14(8.255,-5.712) A15(6.985,-5.712) A16(5.715,-5.712) A17(4.445,-5.712) A18(3.175,-5.712) A19(1.905,-5.712) A20(0.635,-5.712) A21(-0.635,-5.712) A22(-1.905,-5.712) A23(-3.175,-5.712) A24(-4.445,-5.712) A25(-5.715,-5.712) A26(-6.985,-5.712) A27(-8.255,-5.712) A28(-9.525,-5.712) A29(-10.795,-5.712) A30(-12.065,-5.712) A31(-13.335,-5.712) A32(-14.605,-5.712) A33(-15.875,-5.712) A34(-17.145,-5.712) A35(-18.415,-5.712) A36(-19.685,-5.712) A37(-20.955,-5.712) A38(-22.225,-5.712) A39(-23.495,-5.712) A40(-24.765,-5.712) B1(24.765,-4.442) B2(23.495,-4.442) B3(22.225,-4.442) B4(20.955,-4.442) B5(19.685,-4.442) B6(18.415,-4.442) B7(17.145,-4.442) B8(15.875,-4.442) B9(14.605,-4.442) B10(13.335,-4.442) B11(12.065,-4.442) B12(10.795,-4.442) B13(9.525,-4.442) B14(8.255,-4.442) B15(6.985,-4.442) B16(5.715,-4.442) B17(4.445,-4.442) B18(3.175,-4.442) B19(1.905,-4.442) B20(0.635,-4.442) B21(-0.635,-4.442) B22(-1.905,-4.442) B23(-3.175,-4.442) B24(-4.445,-4.442) B25(-5.715,-4.442) B26(-6.985,-4.442) B27(-8.255,-4.442) B28(-9.525,-4.442) B29(-10.795,-4.442) B30(-12.065,-4.442) B31(-13.335,-4.442) B32(-14.605,-4.442) B33(-15.875,-4.442) B34(-17.145,-4.442) B35(-18.415,-4.442) B36(-19.685,-4.442) B37(-20.955,-4.442) B38(-22.225,-4.442) B39(-23.495,-4.442) B40(-24.765,-4.442) C1(24.765,-3.172) C2(23.495,-3.172) C3(22.225,-3.172) C4(20.955,-3.172) C5(19.685,-3.172) C6(18.415,-3.172) C7(17.145,-3.172) C8(15.875,-3.172) C9(14.605,-3.172) C10(13.335,-3.172) C11(12.065,-3.172) C12(10.795,-3.172) C13(9.525,-3.172) C14(8.255,-3.172) C15(6.985,-3.172) C16(5.715,-3.172) C17(4.445,-3.172) C18(3.175,-3.172) C19(1.905,-3.172) C20(0.635,-3.172) C21(-0.635,-3.172) C22(-1.905,-3.172) C23(-3.175,-3.172) C24(-4.445,-3.172) C25(-5.715,-3.172) C26(-6.985,-3.172) C27(-8.255,-3.172) C28(-9.525,-3.172) C29(-10.795,-3.172) C30(-12.065,-3.172) C31(-13.335,-3.172) C32(-14.605,-3.172) C33(-15.875,-3.172) C34(-17.145,-3.172) C35(-18.415,-3.172) C36(-19.685,-3.172) C37(-20.955,-3.172) C38(-22.225,-3.172) C39(-23.495,-3.172) C40(-24.765,-3.172) D1(24.765,-1.902) D2(23.495,-1.902) D3(22.225,-1.902) D4(20.955,-1.902) D5(19.685,-1.902) D6(18.415,-1.902) D7(17.145,-1.902) D8(15.875,-1.902) D9(14.605,-1.902) D10(13.335,-1.902) D11(12.065,-1.902) D12(10.795,-1.902) D13(9.525,-1.902) D14(8.255,-1.902) D15(6.985,-1.902) D16(5.715,-1.902) D17(4.445,-1.902) D18(3.175,-1.902) D19(1.905,-1.902) D20(0.635,-1.902) D21(-0.635,-1.902) D22(-1.905,-1.902) D23(-3.175,-1.902) D24(-4.445,-1.902) D25(-5.715,-1.902) D26(-6.985,-1.902) D27(-8.255,-1.902) D28(-9.525,-1.902) D29(-10.795,-1.902) D30(-12.065,-1.902) D31(-13.335,-1.902) D32(-14.605,-1.902) D33(-15.875,-1.902) D34(-17.145,-1.902) D35(-18.415,-1.902) D36(-19.685,-1.902) D37(-20.955,-1.902) D38(-22.225,-1.902) D39(-23.495,-1.902) D40(-24.765,-1.902) E1(24.765,-0.632) E2(23.495,-0.632) E3(22.225,-0.632) E4(20.955,-0.632) E5(19.685,-0.632) E6(18.415,-0.632) E7(17.145,-0.632) E8(15.875,-0.632) E9(14.605,-0.632) E10(13.335,-0.632) E11(12.065,-0.632) E12(10.795,-0.632) E13(9.525,-0.632) E14(8.255,-0.632) E15(6.985,-0.632) E16(5.715,-0.632) E17(4.445,-0.632) E18(3.175,-0.632) E19(1.905,-0.632) E20(0.635,-0.632) E21(-0.635,-0.632) E22(-1.905,-0.632) E23(-3.175,-0.632) E24(-4.445,-0.632) E25(-5.715,-0.632) E26(-6.985,-0.632) E27(-8.255,-0.632) E28(-9.525,-0.632) E29(-10.795,-0.632) E30(-12.065,-0.632) E31(-13.335,-0.632) E32(-14.605,-0.632) E33(-15.875,-0.632) E34(-17.145,-0.632) E35(-18.415,-0.632) E36(-19.685,-0.632) E37(-20.955,-0.632) E38(-22.225,-0.632) E39(-23.495,-0.632) E40(-24.765,-0.632) F1(24.765,0.638) F2(23.495,0.638) F3(22.225,0.638) F4(20.955,0.638) F5(19.685,0.638) F6(18.415,0.638) F7(17.145,0.638) F8(15.875,0.638) F9(14.605,0.638) F10(13.335,0.638) F11(12.065,0.638) F12(10.795,0.638) F13(9.525,0.638) F14(8.255,0.638) F15(6.985,0.638) F16(5.715,0.638) F17(4.445,0.638) F18(3.175,0.638) F19(1.905,0.638) F20(0.635,0.638) F21(-0.635,0.638) F22(-1.905,0.638) F23(-3.175,0.638) F24(-4.445,0.638) F25(-5.715,0.638) F26(-6.985,0.638) F27(-8.255,0.638) F28(-9.525,0.638) F29(-10.795,0.638) F30(-12.065,0.638) F31(-13.335,0.638) F32(-14.605,0.638) F33(-15.875,0.638) F34(-17.145,0.638) F35(-18.415,0.638) F36(-19.685,0.638) F37(-20.955,0.638) F38(-22.225,0.638) F39(-23.495,0.638) F40(-24.765,0.638) G1(24.765,1.908) G2(23.495,1.908) G3(22.225,1.908) G4(20.955,1.908) G5(19.685,1.908) G6(18.415,1.908) G7(17.145,1.908) G8(15.875,1.908) G9(14.605,1.908) G10(13.335,1.908) G11(12.065,1.908) G12(10.795,1.908) G13(9.525,1.908) G14(8.255,1.908) G15(6.985,1.908) G16(5.715,1.908) G17(4.445,1.908) G18(3.175,1.908) G19(1.905,1.908) G20(0.635,1.908) G21(-0.635,1.908) G22(-1.905,1.908) G23(-3.175,1.908) G24(-4.445,1.908) G25(-5.715,1.908) G26(-6.985,1.908) G27(-8.255,1.908) G28(-9.525,1.908) G29(-10.795,1.908) G30(-12.065,1.908) G31(-13.335,1.908) G32(-14.605,1.908) G33(-15.875,1.908) G34(-17.145,1.908) G35(-18.415,1.908) G36(-19.685,1.908) G37(-20.955,1.908) G38(-22.225,1.908) G39(-23.495,1.908) G40(-24.765,1.908) H1(24.765,3.178) H2(23.495,3.178) H3(22.225,3.178) H4(20.955,3.178) H5(19.685,3.178) H6(18.415,3.178) H7(17.145,3.178) H8(15.875,3.178) H9(14.605,3.178) H10(13.335,3.178) H11(12.065,3.178) H12(10.795,3.178) H13(9.525,3.178) H14(8.255,3.178) H15(6.985,3.178) H16(5.715,3.178) H17(4.445,3.178) H18(3.175,3.178) H19(1.905,3.178) H20(0.635,3.178) H21(-0.635,3.178) H22(-1.905,3.178) H23(-3.175,3.178) H24(-4.445,3.178) H25(-5.715,3.178) H26(-6.985,3.178) H27(-8.255,3.178) H28(-9.525,3.178) H29(-10.795,3.178) H30(-12.065,3.178) H31(-13.335,3.178) H32(-14.605,3.178) H33(-15.875,3.178) H34(-17.145,3.178) H35(-18.415,3.178) H36(-19.685,3.178) H37(-20.955,3.178) H38(-22.225,3.178) H39(-23.495,3.178) H40(-24.765,3.178) J1(24.765,4.448) J2(23.495,4.448) J3(22.225,4.448) J4(20.955,4.448) J5(19.685,4.448) J6(18.415,4.448) J7(17.145,4.448) J8(15.875,4.448) J9(14.605,4.448) J10(13.335,4.448) J11(12.065,4.448) J12(10.795,4.448) J13(9.525,4.448) J14(8.255,4.448) J15(6.985,4.448) J16(5.715,4.448) J17(4.445,4.448) J18(3.175,4.448) J19(1.905,4.448) J20(0.635,4.448) J21(-0.635,4.448) J22(-1.905,4.448) J23(-3.175,4.448) J24(-4.445,4.448) J25(-5.715,4.448) J26(-6.985,4.448) J27(-8.255,4.448) J28(-9.525,4.448) J29(-10.795,4.448) J30(-12.065,4.448) J31(-13.335,4.448) J32(-14.605,4.448) J33(-15.875,4.448) J34(-17.145,4.448) J35(-18.415,4.448) J36(-19.685,4.448) J37(-20.955,4.448) J38(-22.225,4.448) J39(-23.495,4.448) J40(-24.765,4.448) K1(24.765,5.718) K2(23.495,5.718) K3(22.225,5.718) K4(20.955,5.718) K5(19.685,5.718) K6(18.415,5.718) K7(17.145,5.718) K8(15.875,5.718) K9(14.605,5.718) K10(13.335,5.718) K11(12.065,5.718) K12(10.795,5.718) K13(9.525,5.718) K14(8.255,5.718) K15(6.985,5.718) K16(5.715,5.718) K17(4.445,5.718) K18(3.175,5.718) K19(1.905,5.718) K20(0.635,5.718) K21(-0.635,5.718) K22(-1.905,5.718) K23(-3.175,5.718) K24(-4.445,5.718) K25(-5.715,5.718) K26(-6.985,5.718) K27(-8.255,5.718) K28(-9.525,5.718) K29(-10.795,5.718) K30(-12.065,5.718) K31(-13.335,5.718) K32(-14.605,5.718) K33(-15.875,5.718) K34(-17.145,5.718) K35(-18.415,5.718) K36(-19.685,5.718) K37(-20.955,5.718) K38(-22.225,5.718) K39(-23.495,5.718) K40(-24.765,5.718)
  round 3.81 hole 2.692: S1(-31.491,2.004) S2(31.491,2.004)
ASP_134486_MAIN_FEMALE-A
  round 1.295 hole 1.295 unplated: (-27.191,0.003) (27.191,-3.045)
  round 0.635 smd: A1(24.765,-5.712) A2(23.495,-5.712) A3(22.225,-5.712) A4(20.955,-5.712) A5(19.685,-5.712) A6(18.415,-5.712) A7(17.145,-5.712) A8(15.875,-5.712) A9(14.605,-5.712) A10(13.335,-5.712) A11(12.065,-5.712) A12(10.795,-5.712) A13(9.525,-5.712) A14(8.255,-5.712) A15(6.985,-5.712) A16(5.715,-5.712) A17(4.445,-5.712) A18(3.175,-5.712) A19(1.905,-5.712) A20(0.635,-5.712) A21(-0.635,-5.712) A22(-1.905,-5.712) A23(-3.175,-5.712) A24(-4.445,-5.712) A25(-5.715,-5.712) A26(-6.985,-5.712) A27(-8.255,-5.712) A28(-9.525,-5.712) A29(-10.795,-5.712) A30(-12.065,-5.712) A31(-13.335,-5.712) A32(-14.605,-5.712) A33(-15.875,-5.712) A34(-17.145,-5.712) A35(-18.415,-5.712) A36(-19.685,-5.712) A37(-20.955,-5.712) A38(-22.225,-5.712) A39(-23.495,-5.712) A40(-24.765,-5.712) B1(24.765,-4.442) B2(23.495,-4.442) B3(22.225,-4.442) B4(20.955,-4.442) B5(19.685,-4.442) B6(18.415,-4.442) B7(17.145,-4.442) B8(15.875,-4.442) B9(14.605,-4.442) B10(13.335,-4.442) B11(12.065,-4.442) B12(10.795,-4.442) B13(9.525,-4.442) B14(8.255,-4.442) B15(6.985,-4.442) B16(5.715,-4.442) B17(4.445,-4.442) B18(3.175,-4.442) B19(1.905,-4.442) B20(0.635,-4.442) B21(-0.635,-4.442) B22(-1.905,-4.442) B23(-3.175,-4.442) B24(-4.445,-4.442) B25(-5.715,-4.442) B26(-6.985,-4.442) B27(-8.255,-4.442) B28(-9.525,-4.442) B29(-10.795,-4.442) B30(-12.065,-4.442) B31(-13.335,-4.442) B32(-14.605,-4.442) B33(-15.875,-4.442) B34(-17.145,-4.442) B35(-18.415,-4.442) B36(-19.685,-4.442) B37(-20.955,-4.442) B38(-22.225,-4.442) B39(-23.495,-4.442) B40(-24.765,-4.442) C1(24.765,-3.172) C2(23.495,-3.172) C3(22.225,-3.172) C4(20.955,-3.172) C5(19.685,-3.172) C6(18.415,-3.172) C7(17.145,-3.172) C8(15.875,-3.172) C9(14.605,-3.172) C10(13.335,-3.172) C11(12.065,-3.172) C12(10.795,-3.172) C13(9.525,-3.172) C14(8.255,-3.172) C15(6.985,-3.172) C16(5.715,-3.172) C17(4.445,-3.172) C18(3.175,-3.172) C19(1.905,-3.172) C20(0.635,-3.172) C21(-0.635,-3.172) C22(-1.905,-3.172) C23(-3.175,-3.172) C24(-4.445,-3.172) C25(-5.715,-3.172) C26(-6.985,-3.172) C27(-8.255,-3.172) C28(-9.525,-3.172) C29(-10.795,-3.172) C30(-12.065,-3.172) C31(-13.335,-3.172) C32(-14.605,-3.172) C33(-15.875,-3.172) C34(-17.145,-3.172) C35(-18.415,-3.172) C36(-19.685,-3.172) C37(-20.955,-3.172) C38(-22.225,-3.172) C39(-23.495,-3.172) C40(-24.765,-3.172) D1(24.765,-1.902) D2(23.495,-1.902) D3(22.225,-1.902) D4(20.955,-1.902) D5(19.685,-1.902) D6(18.415,-1.902) D7(17.145,-1.902) D8(15.875,-1.902) D9(14.605,-1.902) D10(13.335,-1.902) D11(12.065,-1.902) D12(10.795,-1.902) D13(9.525,-1.902) D14(8.255,-1.902) D15(6.985,-1.902) D16(5.715,-1.902) D17(4.445,-1.902) D18(3.175,-1.902) D19(1.905,-1.902) D20(0.635,-1.902) D21(-0.635,-1.902) D22(-1.905,-1.902) D23(-3.175,-1.902) D24(-4.445,-1.902) D25(-5.715,-1.902) D26(-6.985,-1.902) D27(-8.255,-1.902) D28(-9.525,-1.902) D29(-10.795,-1.902) D30(-12.065,-1.902) D31(-13.335,-1.902) D32(-14.605,-1.902) D33(-15.875,-1.902) D34(-17.145,-1.902) D35(-18.415,-1.902) D36(-19.685,-1.902) D37(-20.955,-1.902) D38(-22.225,-1.902) D39(-23.495,-1.902) D40(-24.765,-1.902) E1(24.765,-0.632) E2(23.495,-0.632) E3(22.225,-0.632) E4(20.955,-0.632) E5(19.685,-0.632) E6(18.415,-0.632) E7(17.145,-0.632) E8(15.875,-0.632) E9(14.605,-0.632) E10(13.335,-0.632) E11(12.065,-0.632) E12(10.795,-0.632) E13(9.525,-0.632) E14(8.255,-0.632) E15(6.985,-0.632) E16(5.715,-0.632) E17(4.445,-0.632) E18(3.175,-0.632) E19(1.905,-0.632) E20(0.635,-0.632) E21(-0.635,-0.632) E22(-1.905,-0.632) E23(-3.175,-0.632) E24(-4.445,-0.632) E25(-5.715,-0.632) E26(-6.985,-0.632) E27(-8.255,-0.632) E28(-9.525,-0.632) E29(-10.795,-0.632) E30(-12.065,-0.632) E31(-13.335,-0.632) E32(-14.605,-0.632) E33(-15.875,-0.632) E34(-17.145,-0.632) E35(-18.415,-0.632) E36(-19.685,-0.632) E37(-20.955,-0.632) E38(-22.225,-0.632) E39(-23.495,-0.632) E40(-24.765,-0.632) F1(24.765,0.638) F2(23.495,0.638) F3(22.225,0.638) F4(20.955,0.638) F5(19.685,0.638) F6(18.415,0.638) F7(17.145,0.638) F8(15.875,0.638) F9(14.605,0.638) F10(13.335,0.638) F11(12.065,0.638) F12(10.795,0.638) F13(9.525,0.638) F14(8.255,0.638) F15(6.985,0.638) F16(5.715,0.638) F17(4.445,0.638) F18(3.175,0.638) F19(1.905,0.638) F20(0.635,0.638) F21(-0.635,0.638) F22(-1.905,0.638) F23(-3.175,0.638) F24(-4.445,0.638) F25(-5.715,0.638) F26(-6.985,0.638) F27(-8.255,0.638) F28(-9.525,0.638) F29(-10.795,0.638) F30(-12.065,0.638) F31(-13.335,0.638) F32(-14.605,0.638) F33(-15.875,0.638) F34(-17.145,0.638) F35(-18.415,0.638) F36(-19.685,0.638) F37(-20.955,0.638) F38(-22.225,0.638) F39(-23.495,0.638) F40(-24.765,0.638) G1(24.765,1.908) G2(23.495,1.908) G3(22.225,1.908) G4(20.955,1.908) G5(19.685,1.908) G6(18.415,1.908) G7(17.145,1.908) G8(15.875,1.908) G9(14.605,1.908) G10(13.335,1.908) G11(12.065,1.908) G12(10.795,1.908) G13(9.525,1.908) G14(8.255,1.908) G15(6.985,1.908) G16(5.715,1.908) G17(4.445,1.908) G18(3.175,1.908) G19(1.905,1.908) G20(0.635,1.908) G21(-0.635,1.908) G22(-1.905,1.908) G23(-3.175,1.908) G24(-4.445,1.908) G25(-5.715,1.908) G26(-6.985,1.908) G27(-8.255,1.908) G28(-9.525,1.908) G29(-10.795,1.908) G30(-12.065,1.908) G31(-13.335,1.908) G32(-14.605,1.908) G33(-15.875,1.908) G34(-17.145,1.908) G35(-18.415,1.908) G36(-19.685,1.908) G37(-20.955,1.908) G38(-22.225,1.908) G39(-23.495,1.908) G40(-24.765,1.908) H1(24.765,3.178) H2(23.495,3.178) H3(22.225,3.178) H4(20.955,3.178) H5(19.685,3.178) H6(18.415,3.178) H7(17.145,3.178) H8(15.875,3.178) H9(14.605,3.178) H10(13.335,3.178) H11(12.065,3.178) H12(10.795,3.178) H13(9.525,3.178) H14(8.255,3.178) H15(6.985,3.178) H16(5.715,3.178) H17(4.445,3.178) H18(3.175,3.178) H19(1.905,3.178) H20(0.635,3.178) H21(-0.635,3.178) H22(-1.905,3.178) H23(-3.175,3.178) H24(-4.445,3.178) H25(-5.715,3.178) H26(-6.985,3.178) H27(-8.255,3.178) H28(-9.525,3.178) H29(-10.795,3.178) H30(-12.065,3.178) H31(-13.335,3.178) H32(-14.605,3.178) H33(-15.875,3.178) H34(-17.145,3.178) H35(-18.415,3.178) H36(-19.685,3.178) H37(-20.955,3.178) H38(-22.225,3.178) H39(-23.495,3.178) H40(-24.765,3.178) J1(24.765,4.448) J2(23.495,4.448) J3(22.225,4.448) J4(20.955,4.448) J5(19.685,4.448) J6(18.415,4.448) J7(17.145,4.448) J8(15.875,4.448) J9(14.605,4.448) J10(13.335,4.448) J11(12.065,4.448) J12(10.795,4.448) J13(9.525,4.448) J14(8.255,4.448) J15(6.985,4.448) J16(5.715,4.448) J17(4.445,4.448) J18(3.175,4.448) J19(1.905,4.448) J20(0.635,4.448) J21(-0.635,4.448) J22(-1.905,4.448) J23(-3.175,4.448) J24(-4.445,4.448) J25(-5.715,4.448) J26(-6.985,4.448) J27(-8.255,4.448) J28(-9.525,4.448) J29(-10.795,4.448) J30(-12.065,4.448) J31(-13.335,4.448) J32(-14.605,4.448) J33(-15.875,4.448) J34(-17.145,4.448) J35(-18.415,4.448) J36(-19.685,4.448) J37(-20.955,4.448) J38(-22.225,4.448) J39(-23.495,4.448) J40(-24.765,4.448) K1(24.765,5.718) K2(23.495,5.718) K3(22.225,5.718) K4(20.955,5.718) K5(19.685,5.718) K6(18.415,5.718) K7(17.145,5.718) K8(15.875,5.718) K9(14.605,5.718) K10(13.335,5.718) K11(12.065,5.718) K12(10.795,5.718) K13(9.525,5.718) K14(8.255,5.718) K15(6.985,5.718) K16(5.715,5.718) K17(4.445,5.718) K18(3.175,5.718) K19(1.905,5.718) K20(0.635,5.718) K21(-0.635,5.718) K22(-1.905,5.718) K23(-3.175,5.718) K24(-4.445,5.718) K25(-5.715,5.718) K26(-6.985,5.718) K27(-8.255,5.718) K28(-9.525,5.718) K29(-10.795,5.718) K30(-12.065,5.718) K31(-13.335,5.718) K32(-14.605,5.718) K33(-15.875,5.718) K34(-17.145,5.718) K35(-18.415,5.718) K36(-19.685,5.718) K37(-20.955,5.718) K38(-22.225,5.718) K39(-23.495,5.718) K40(-24.765,5.718)
  round 3.81 hole 2.692: S1(-31.491,2.004) S2(31.491,2.004)
